# Altium PCB PCB1.PcbDoc
Units mm, origin at the board's own origin, x right, y up, seen from the top; angles counter-clockwise.
Board outline 100 x 96.5 mm, 2 copper layers (Top Layer, Bottom Layer), stack 1.98 mm thick; 68 components, 98 nets, 369 pads, 163 vias.
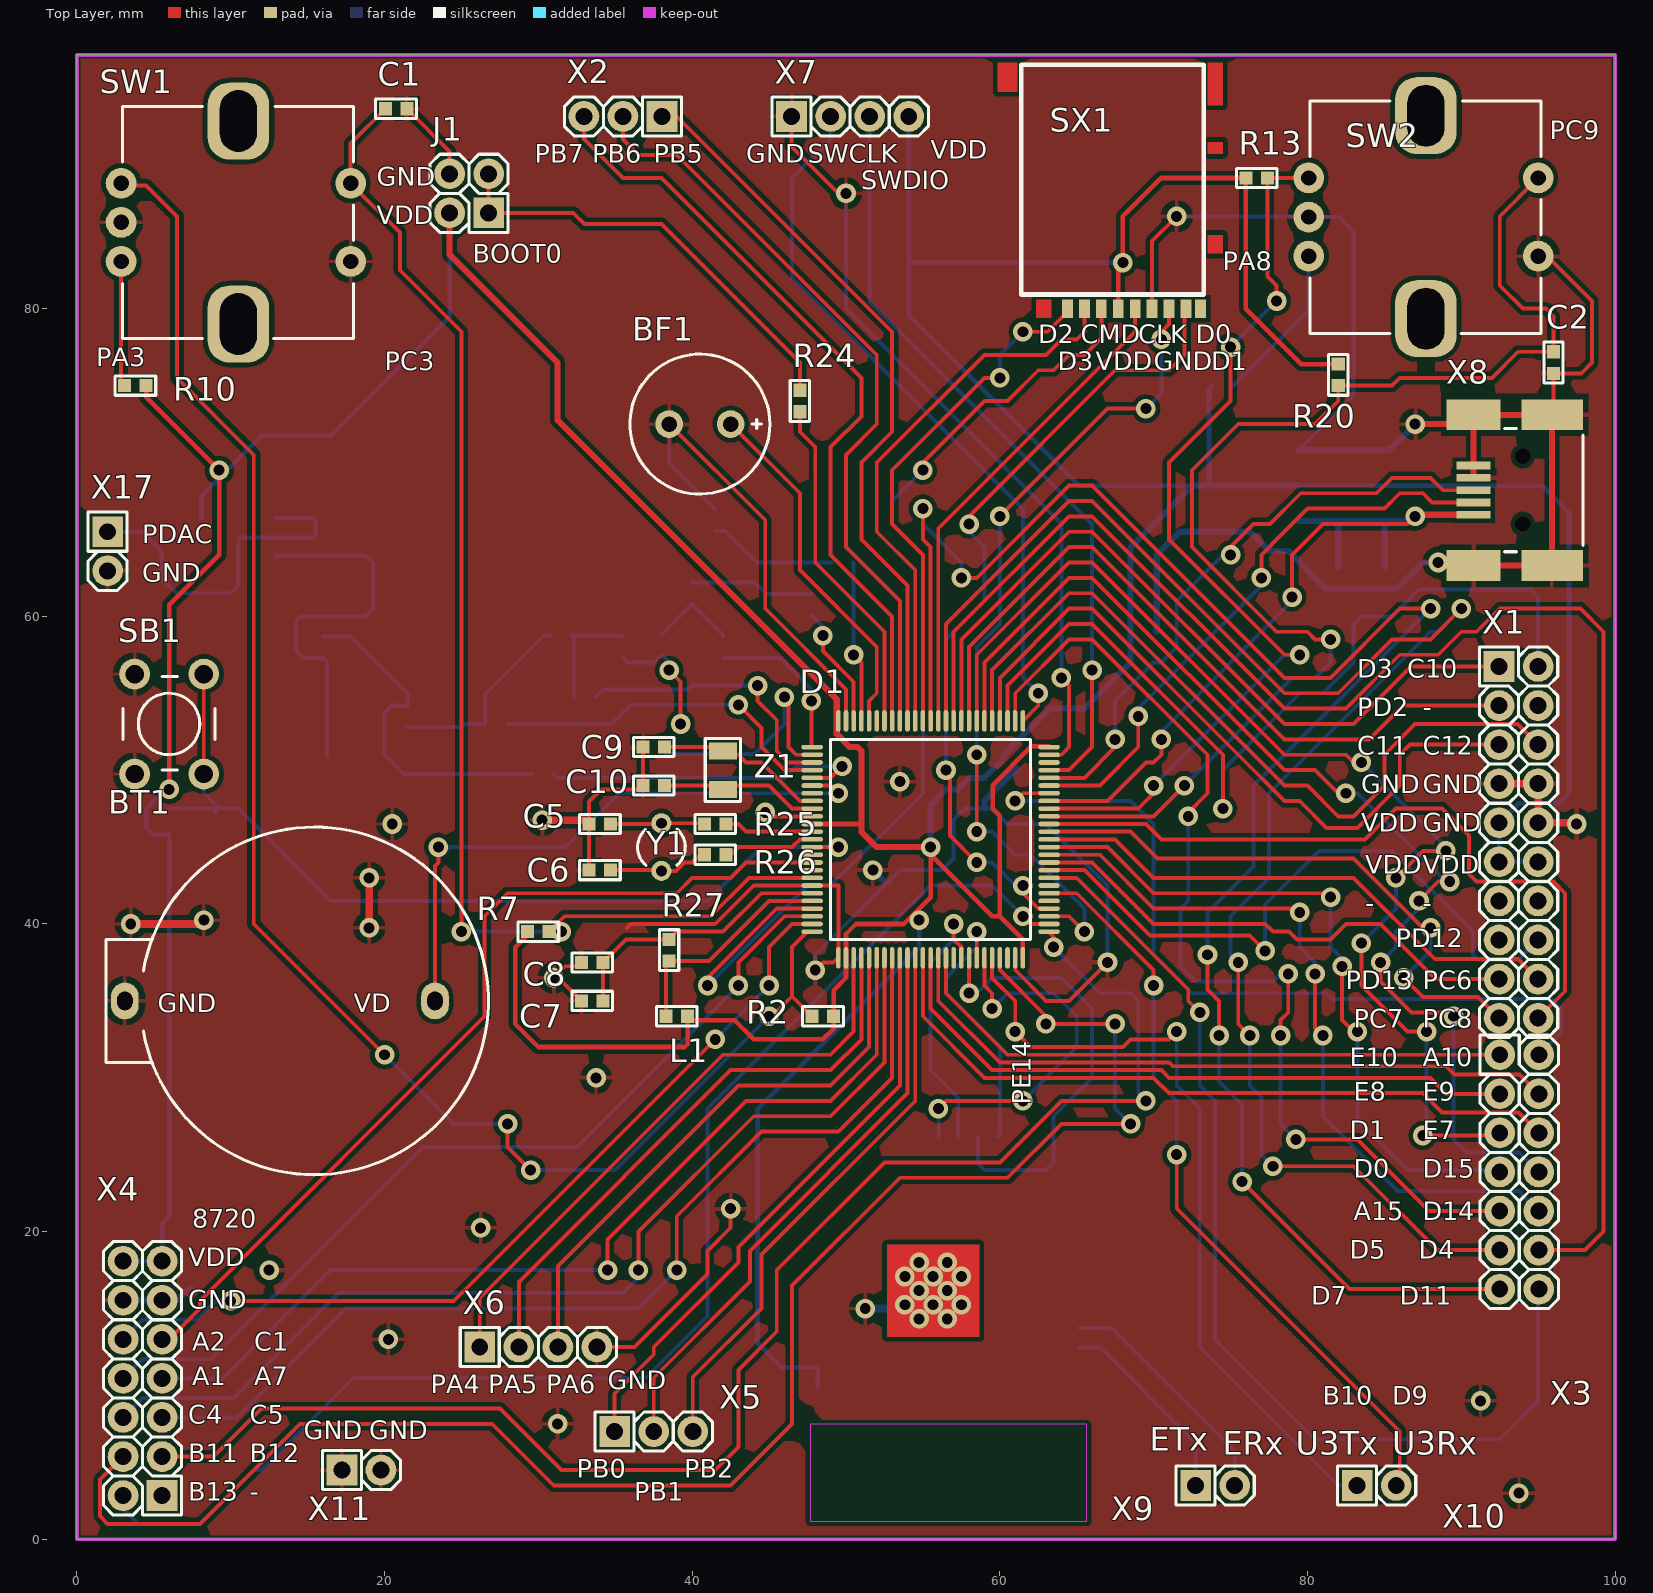
[diagram p0: Top Layer view]
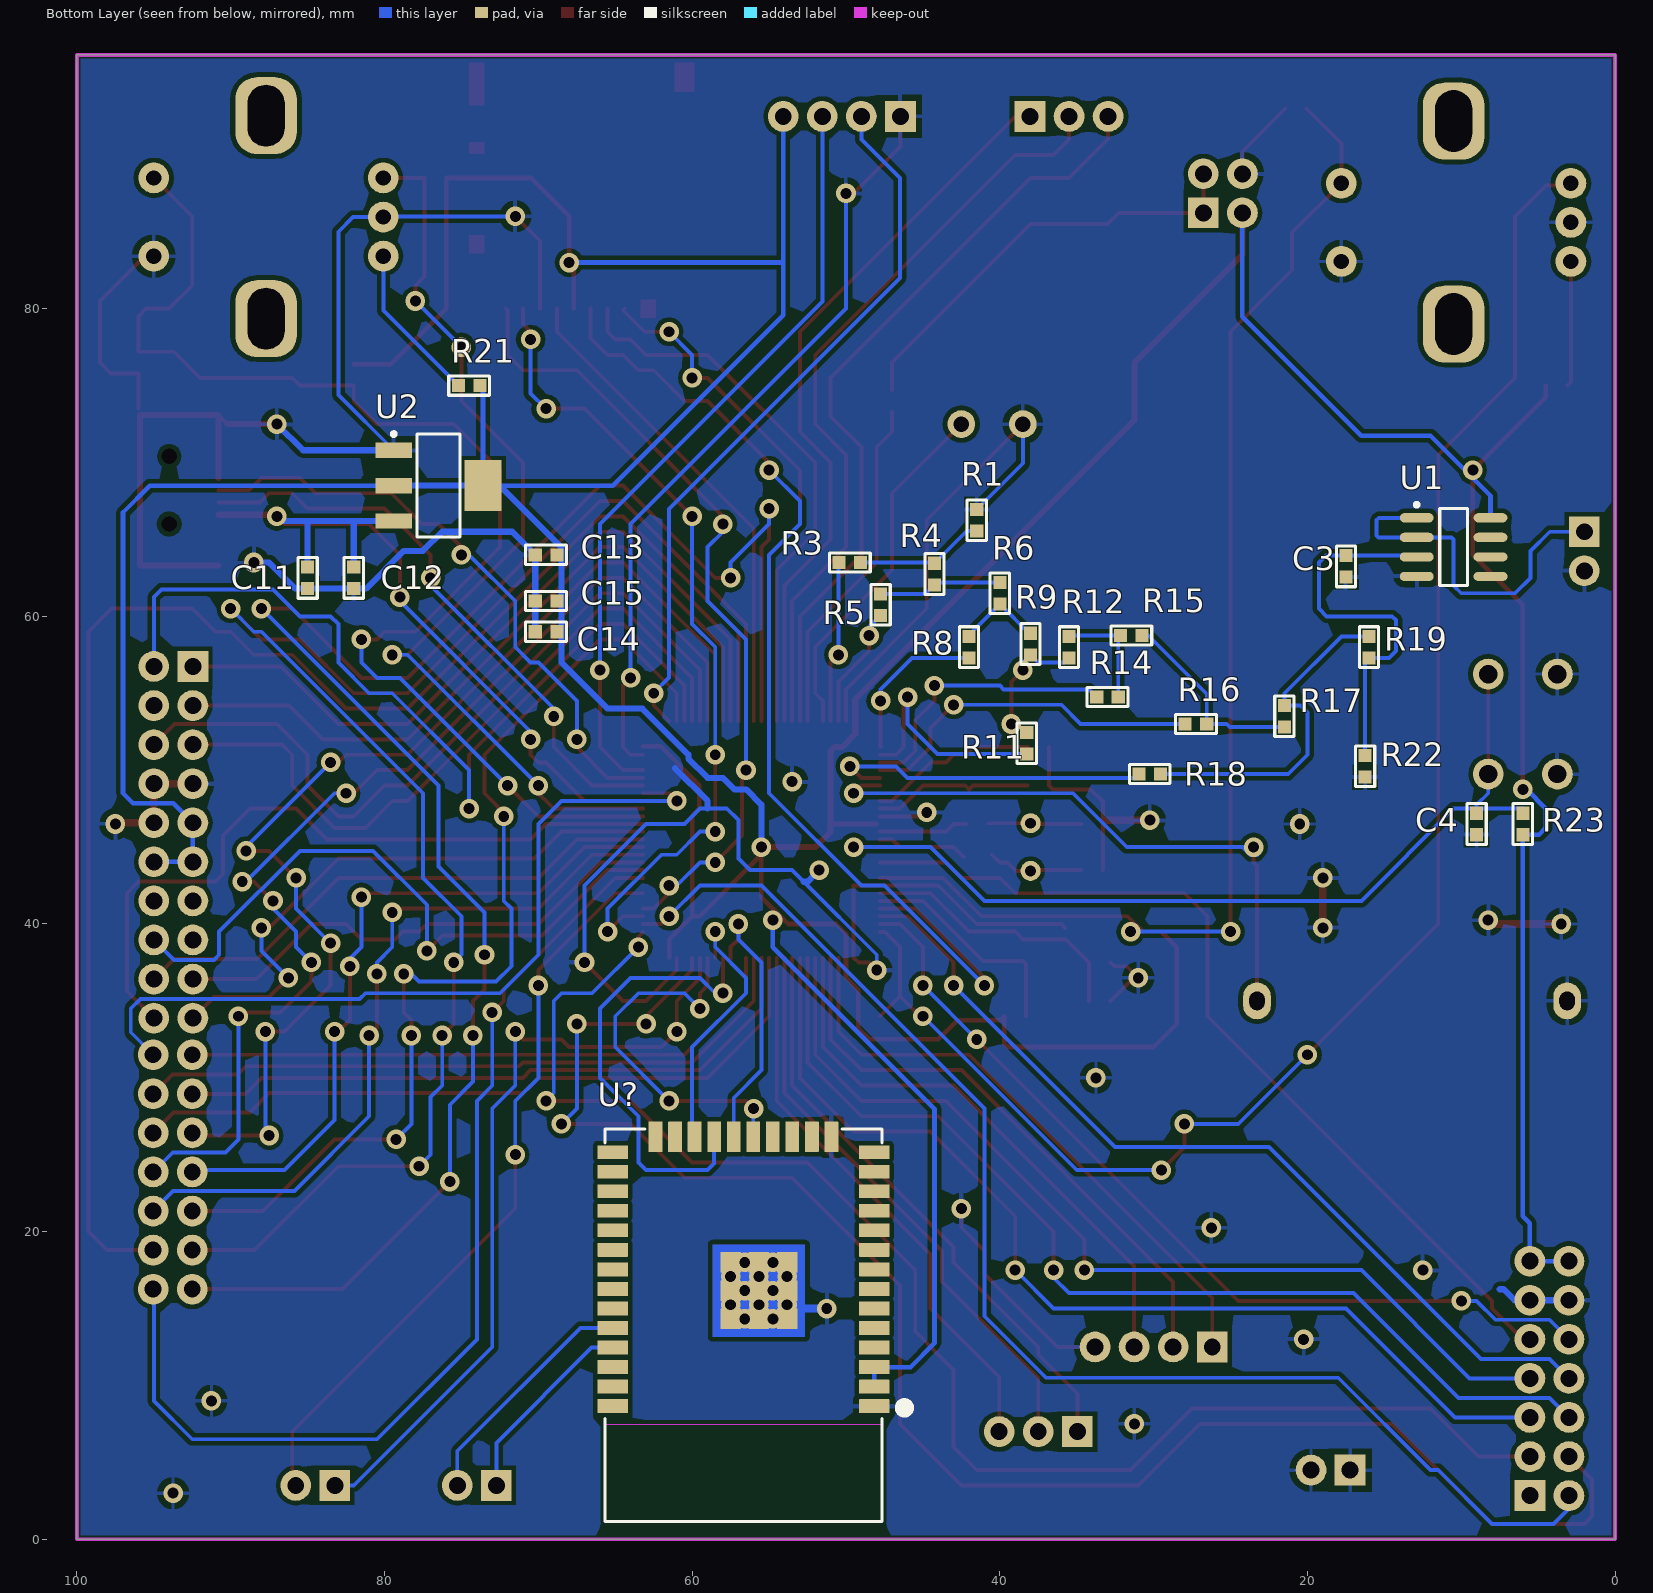
[diagram p1: Bottom Layer view, seen from below]
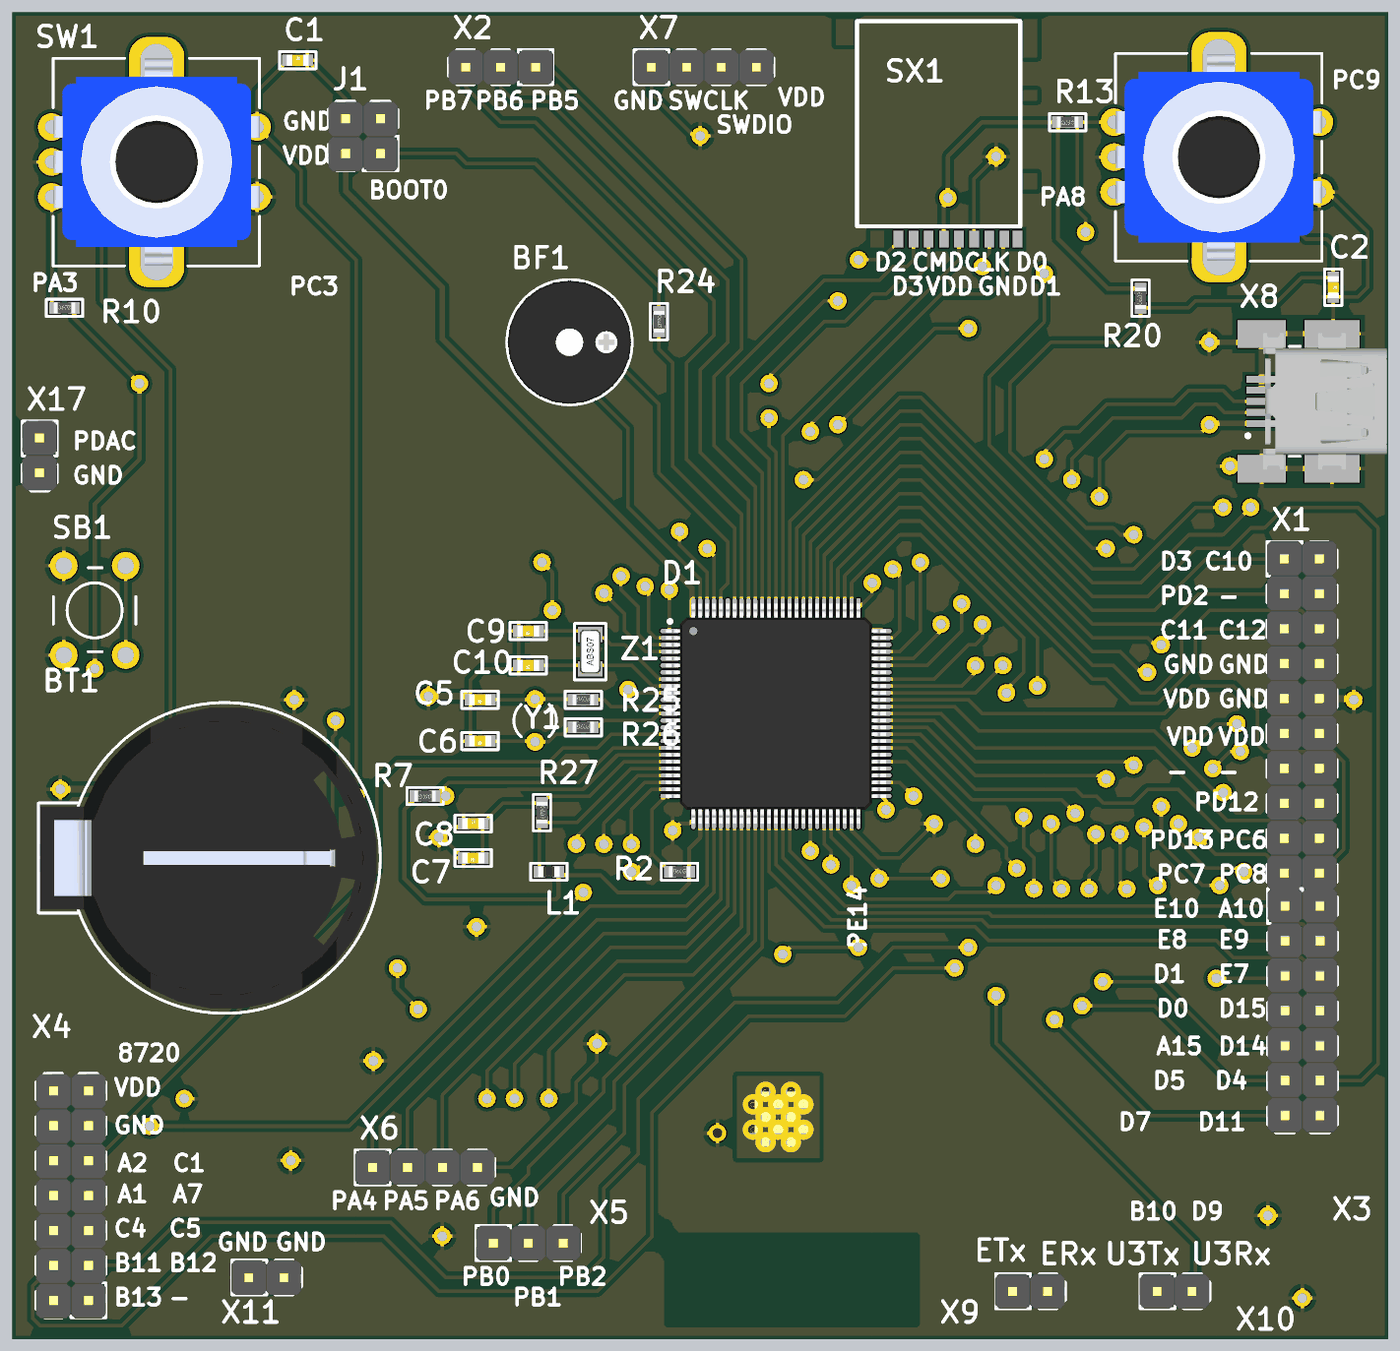
[diagram p2: 3D render of the assembled board from above, using the file's embedded part models]
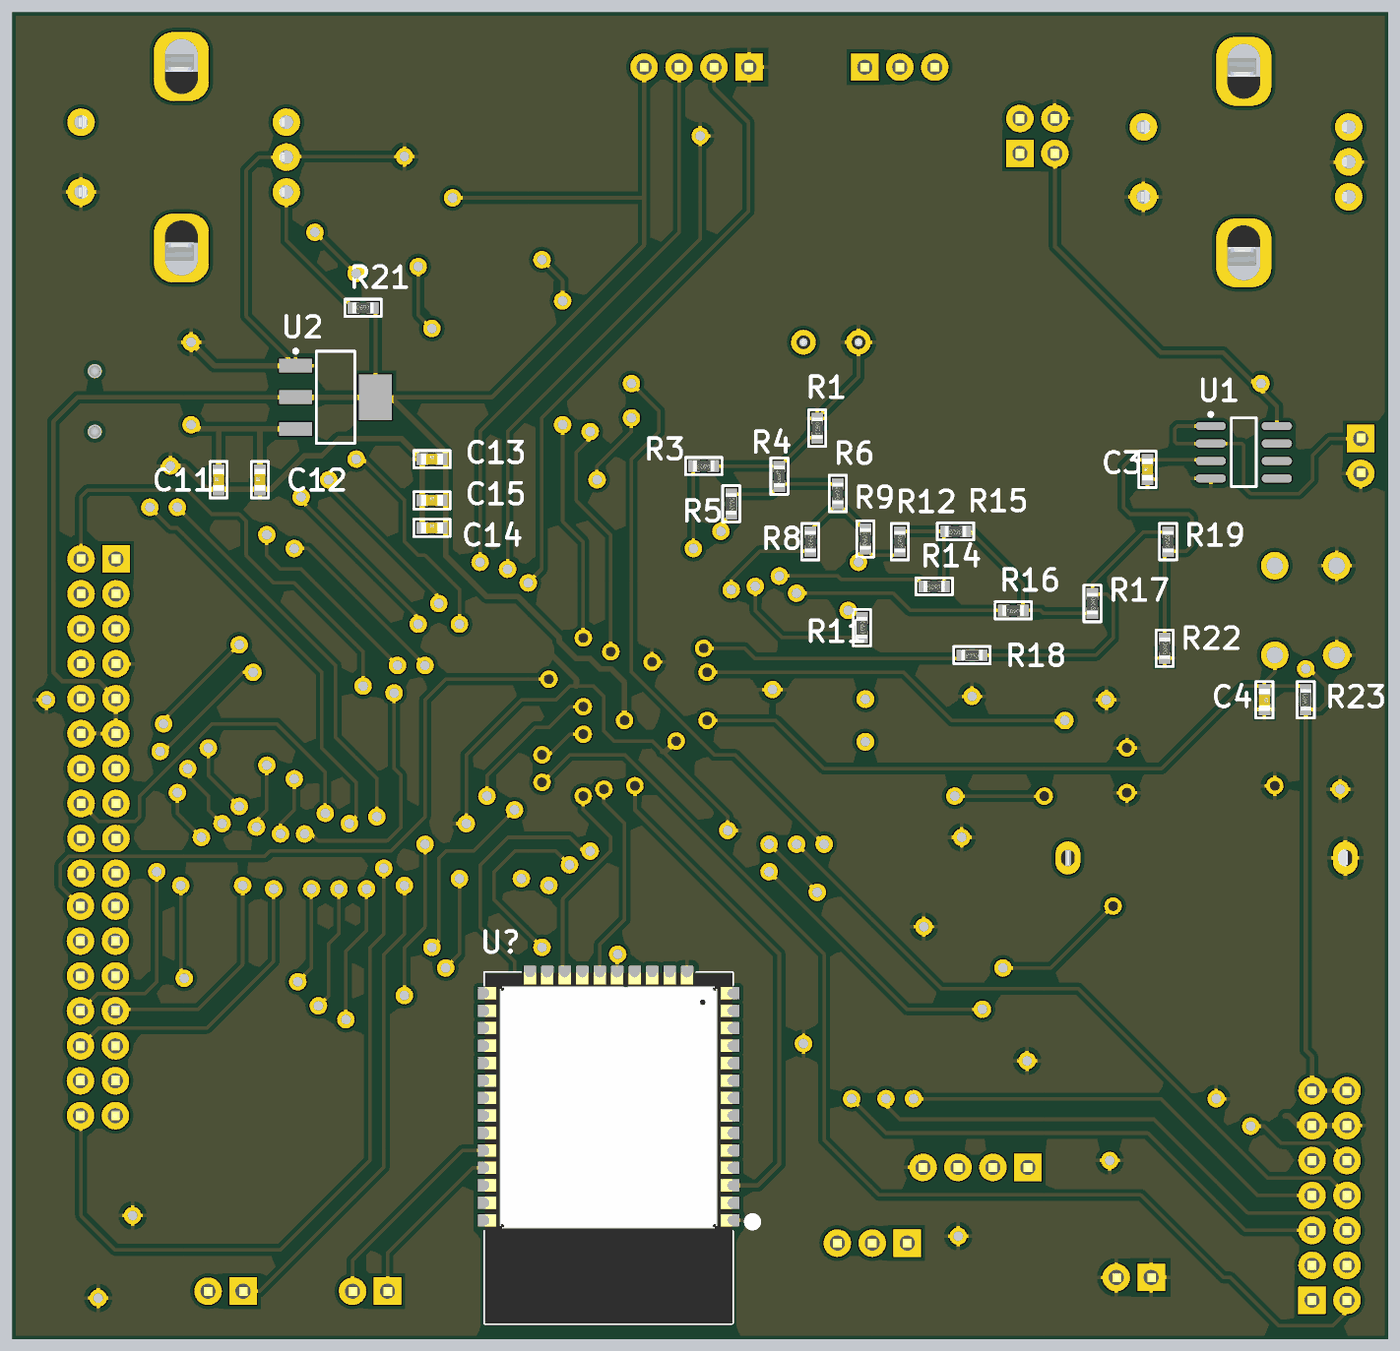
[diagram p3: 3D render of the assembled board from below, using the file's embedded part models]

## Layer stack, top to bottom
Top Solder: solder mask 0.0102, Solder Resist, Dk 3.5
Top Layer: signal copper 0.0356
Dielectric 1: dielectric 1.909, FR-4, Dk 4.8
Bottom Layer: signal copper 0.0356
Bottom Solder: solder mask 0.0102, Solder Resist, Dk 3.5

## Board outline
0,0 100,0 100,96.5 0,96.5

## Design rules (kind name [scope] priority, off if disabled: settings)
Clearance [All] p1: gap=0.3 ignorepadtopadclearanceinfootprint=FALSE
PolygonConnect [All] p1: connectstyle=Relief reliefconductorwidth=0.254 reliefentries=4 polygonreliefangle="90 Angle" airgapwidth=0.4
RoomDefinition Sheet1 [InComponentClass('Sheet1')] p1: confinementstyle=ConfineIn formatcopy=TRUE lockcomponents=FALSE outline -125,-125 -74.2,-125 -74.2,-99.6 -125,-99.6
RoutingVias [All] p1: holewidth=0.711 width=1.27 viastyle="Through Hole" minholewidth=0.711 minwidth=1.27 maxholewidth=0.711 maxwidth=1.27
SolderMaskExpansion [All] p1: expansion=0.102
UnpouredPolygon [InNet('GND')] p1:
Width [InNet('GND')] p1: maxlimit=0.6 minlimit=0.3 preferedwidth=0.4
29 further rules are at their usual default settings.

## Components (designator, comment, footprint, x,y, rotation, side; value= is the part's Value field where it differs from the comment)
BF1 "DIP switch, 2.73 kHz, 3VDC, 80mA, -20...+70°C" "BUZ: AT-0927-TT-6-R" 40.5,72.5 r0 top
BT1 "BAT3volt" BTH2032 15.5,35 r0 top
C1 "Ceramic capacitor, 100nF, X7R, ±10%, 16V, 0603, -55...+125°C" "CAP: 0603" 20.75,93 r0 top value=100nF
C2 "Ceramic capacitor, 100nF, X7R, ±10%, 16V, 0603, -55...+125°C" "CAP: 0603" 96,76.5 r270 top value=100nF
C3 "Ceramic capacitor, 20pF, X7R, ±10%, 16V, 0603, -55...+125°C" "CAP: 0603" 17.5,63.25 r90 bottom value=20pF
C4 "Ceramic capacitor, 100nF, X7R, ±10%, 16V, 0603, -55...+125°C" "CAP: 0603" 9,46.5 r270 bottom value=100nF
C5 "Ceramic capacitor, 20pF, X7R, ±10%, 16V, 0603, -55...+125°C" "CAP: 0603" 34,46.5 r180 top value=20pF
C6 "Ceramic capacitor, 20pF, X7R, ±10%, 16V, 0603, -55...+125°C" "CAP: 0603" 34,43.5 r180 top value=20pF
C7 "Ceramic capacitor, 4.7uF, X7R, ±10%, 16V, 0603, -55...+125°C" "CAP: 0603" 33.5,35 r180 top value=4.7uF
C8 "Ceramic capacitor, 100nF, X7R, ±10%, 16V, 0603, -55...+125°C" "CAP: 0603" 33.5,37.5 r0 top value=100nF
C9 "Ceramic capacitor, 20pF, X7R, ±10%, 16V, 0603, -55...+125°C" "CAP: 0603" 37.5,51.5 r180 top value=20pF
C10 "Ceramic capacitor, 20pF, X7R, ±10%, 16V, 0603, -55...+125°C" "CAP: 0603" 37.5,49 r180 top value=20pF
C11 "Ceramic capacitor, 1uF, X7R, ±10%, 16V, 0603, -55...+125°C" "CAP: 0603" 85,62.5 r90 bottom value=1uF
C12 "Ceramic capacitor, 100nF, X7R, ±10%, 16V, 0603, -55...+125°C" "CAP: 0603" 82,62.5 r90 bottom value=100nF
C13 "Ceramic capacitor, 10nF, X7R, ±10%, 16V, 0603, -55...+125°C" "CAP: 0603" 69.5,64 r180 bottom value=10nF
C14 "Ceramic capacitor, 1uF, X7R, ±10%, 16V, 0603, -55...+125°C" "CAP: 0603" 69.5,59 r180 bottom value=1uF
C15 "Ceramic capacitor, 100nF, X7R, ±10%, 16V, 0603, -55...+125°C" "CAP: 0603" 69.5,61 r180 bottom value=100nF
D1 "IC microcontroller, 32-Bit, Cortex-M7, 400MHz, 2048KB, 1024KB, 1.71...3.6V, -40...+85°C, 100-LQFP" 100-LQFP 55.5,45.5 r0 top
J1 "ValueManufacturerPartNumber" "CON: PLD-4" 25.5,87.5 r90 top
L1 "Fixed inductor, 10μH, ±20%, 0603, 50mA, -55...+125°C" "IND: 0603" 39,34 r0 top value=10?H
R1 "Resistor film, 2 kOhm, ±1%, 0603, 0.1W, -55...+125°C" "RES: 0603" 41.5,66.25 r270 bottom value="2 kOhm"
R2 "Resistor film, 10 kOhm, ±5%, 0603, 0.1W, -55...+125°C" "RES: 0603" 48.5,34 r0 top value="10 kOhm"
R3 "Resistor film, 2 kOhm, ±1%, 0603, 0.1W, -55...+125°C" "RES: 0603" 49.75,63.5 r0 bottom value="2 kOhm"
R4 "Resistor film, 1 kOhm, ±1%, 0603, 0.1W, -55...+125°C" "RES: 0603" 44.25,62.75 r90 bottom value="1 kOhm"
R5 "Resistor film, 2 kOhm, ±1%, 0603, 0.1W, -55...+125°C" "RES: 0603" 47.75,60.75 r270 bottom value="2 kOhm"
R6 "Resistor film, 1 kOhm, ±1%, 0603, 0.1W, -55...+125°C" "RES: 0603" 40,61.5 r90 bottom value="1 kOhm"
R7 "Resistor film, 10 kOhm, ±5%, 0603, 0.1W, -55...+125°C" "RES: 0603" 30,39.5 r180 top value="10 kOhm"
R8 "Resistor film, 2 kOhm, ±1%, 0603, 0.1W, -55...+125°C" "RES: 0603" 42,58 r270 bottom value="2 kOhm"
R9 "Resistor film, 1 kOhm, ±1%, 0603, 0.1W, -55...+125°C" "RES: 0603" 38,58.2 r90 bottom value="1 kOhm"
R10 "Resistor film, 10 kOhm, ±5%, 0603, 0.1W, -55...+125°C" "RES: 0603" 3.8,75 r0 top value="10 kOhm"
R11 "Resistor film, 2 kOhm, ±1%, 0603, 0.1W, -55...+125°C" "RES: 0603" 38.25,51.75 r270 bottom value="2 kOhm"
R12 "Resistor film, 1 kOhm, ±1%, 0603, 0.1W, -55...+125°C" "RES: 0603" 35.5,58 r270 bottom value="1 kOhm"
R13 "Resistor film, 10 kOhm, ±5%, 0603, 0.1W, -55...+125°C" "RES: 0603" 76.7,88.5 r180 top value="10 kOhm"
R14 "Resistor film, 2 kOhm, ±1%, 0603, 0.1W, -55...+125°C" "RES: 0603" 33,54.75 r0 bottom value="2 kOhm"
R15 "Resistor film, 1 kOhm, ±1%, 0603, 0.1W, -55...+125°C" "RES: 0603" 31.45,58.75 r0 bottom value="1 kOhm"
R16 "Resistor film, 2 kOhm, ±1%, 0603, 0.1W, -55...+125°C" "RES: 0603" 27.25,53 r0 bottom value="2 kOhm"
R17 "Resistor film, 1 kOhm, ±1%, 0603, 0.1W, -55...+125°C" "RES: 0603" 21.5,53.5 r270 bottom value="1 kOhm"
R18 "Resistor film, 2 kOhm, ±1%, 0603, 0.1W, -55...+125°C" "RES: 0603" 30.25,49.75 r0 bottom value="2 kOhm"
R19 "Resistor film, 2 kOhm, ±1%, 0603, 0.1W, -55...+125°C" "RES: 0603" 16,58 r90 bottom value="2 kOhm"
R20 "Resistor film, 10 kOhm, ±5%, 0603, 0.1W, -55...+125°C" "RES: 0603" 82,75.7 r90 top value="10 kOhm"
R21 "Resistor film, 10 kOhm, ±5%, 0603, 0.1W, -55...+125°C" "RES: 0603" 74.5,75 r180 bottom value="10 kOhm"
R22 "Resistor film, 100 kOhm, ±1%, 0603, 0.1W, -55...+125°C" "RES: 0603" 16.25,50.25 r270 bottom value="100 kOhm"
R23 "Resistor film, 100 kOhm, ±5%, 0603, 0.1W, -55...+125°C" "RES: 0603" 6,46.5 r90 bottom value="100 kOhm"
R24 "Resistor film, 10 kOhm, ±5%, 0603, 0.1W, -55...+125°C" "RES: 0603" 47,74 r270 top value="10 kOhm"
R25 "Resistor film, 0 Ohm, ±5%, 0603, 0.1W, -55...+125°C" "RES: 0603" 41.5,46.5 r0 top value="0 Ohm"
R26 "Resistor film, 220 Ohm, ±5%, 0603, 0.1W, -55...+125°C" "RES: 0603" 41.5,44.5 r0 top value="220 Ohm"
R27 "Resistor film, 47Ohm, ±5%, 0603, 0.1W, -55...+125°C" "RES: 0603" 38.5,38.3 r270 top value=47Ohm
SB1 "Tactile button, 6x6mm" "BUT: 6x6" 6,53 r90 top
SW1 "Quadrature encoder, PEC12R" "ENC: PEC-12" 2.875,88.15 r270 top
SW2 "Quadrature encoder, PEC12R" "ENC: PEC-12" 80.078,88.5 r270 top
SX1 "Microsd" microsd 74.5,96 r180 top
U1 "ADA4891-2ARZ-RL" ADI-R-8_N 10.5,64.5 r180 bottom
U2 "LD1117AS33TR" SOT-223_N 76.5,68.5 r180 bottom
U? "ESP-WROOM-32" "Espressif ESP32-WROOM-32" 56.665,16.165 r0 bottom
X1 "Connector, 20pin, 2.54mm, 500VAC, 3A" "CON: PLD-20" 93.73,45.31 r270 top
X2 "Connector, 3pin, 2.54mm, 500VAC, 3A" "CON: PLS-3" 35.5,92.5 r180 top
X3 "Connector, 14pin, 2.54mm, 500VAC, 3A" "CON: PLD-14"#1 93.77,23.88 r270 top
X4 "Connector, 14pin, 2.54mm, 500VAC, 3A" "CON: PLD-14"#2 4.27,10.46 r90 top
X5 "Connector, 3pin, 2.54mm, 500VAC, 3A" "CON: PLS-3" 37.5,7 r0 top
X6 "Connector, 4pin, 2.54mm, 500VAC, 3A" "CON: PLS-4" 30,12.5 r0 top
X7 "Connector, 4pin, 2.54mm, 500VAC, 3A" "CON: PLS-4" 50.27,92.5 r0 top
X8 "USB mini B" "CON: 0675031020" 90.8,68.2 r180 top
X9 "Connector, 2pin, 2.54mm, 500VAC, 3A" "CON: PLS-2" 74,3.5 r0 top
X10 "Connector, 2pin, 2.54mm, 500VAC, 3A" "CON: PLS-2" 84.5,3.5 r0 top
X11 "Connector, 2pin, 2.54mm, 500VAC, 3A" "CON: PLS-2" 18.5,4.5 r0 top
X17 "Connector, 2pin, 2.54mm, 500VAC, 3A" "CON: PLS-2" 2,64.23 r270 top
Y1 "XTAL" R38 38,45 r0 top
Z1 "Crystal, 32.768kHz, 12.5pF, ±20ppm, case 3215, -40...+85°C" "OSC: 3215" 42,50 r90 top

## Footprints (in the part's own frame and the unit in brackets; to place one, negate y for a bottom-side part, rotate by r counter-clockwise, add the part's x,y. Pads: shape width x height; smd on the part's side, far side on the other; paste and mask are expansions set on the pad)
100-LQFP [mm] "Thin QFP, 100-Leads, Body 14x14mm, Pitch 0.5mm, IPC Medium Density"
  oval 1.4x0.3 smd: 1(-7.7,6) 2(-7.7,5.5) 3(-7.7,5) 4(-7.7,4.5) 5(-7.7,4) 6(-7.7,3.5) 7(-7.7,3) 8(-7.7,2.5) 9(-7.7,2) 10(-7.7,1.5) 11(-7.7,1) 12(-7.7,0.5) 13(-7.7,0) 14(-7.7,-0.5) 15(-7.7,-1) 16(-7.7,-1.5) 17(-7.7,-2) 18(-7.7,-2.5) 19(-7.7,-3) 20(-7.7,-3.5) 21(-7.7,-4) 22(-7.7,-4.5) 23(-7.7,-5) 24(-7.7,-5.5) 25(-7.7,-6) 51(7.7,-6) 52(7.7,-5.5) 53(7.7,-5) 54(7.7,-4.5) 55(7.7,-4) 56(7.7,-3.5) 57(7.7,-3) 58(7.7,-2.5) 59(7.7,-2) 60(7.7,-1.5) 61(7.7,-1) 62(7.7,-0.5) 63(7.7,0) 64(7.7,0.5) 65(7.7,1) 66(7.7,1.5) 67(7.7,2) 68(7.7,2.5) 69(7.7,3) 70(7.7,3.5) 71(7.7,4) 72(7.7,4.5) 73(7.7,5) 74(7.7,5.5) 75(7.7,6)
  oval 0.3x1.4 smd: 26(-6,-7.7) 27(-5.5,-7.7) 28(-5,-7.7) 29(-4.5,-7.7) 30(-4,-7.7) 31(-3.5,-7.7) 32(-3,-7.7) 33(-2.5,-7.7) 34(-2,-7.7) 35(-1.5,-7.7) 36(-1,-7.7) 37(-0.5,-7.7) 38(0,-7.7) 39(0.5,-7.7) 40(1,-7.7) 41(1.5,-7.7) 42(2,-7.7) 43(2.5,-7.7) 44(3,-7.7) 45(3.5,-7.7) 46(4,-7.7) 47(4.5,-7.7) 48(5,-7.7) 49(5.5,-7.7) 50(6,-7.7) 76(6,7.7) 77(5.5,7.7) 78(5,7.7) 79(4.5,7.7) 80(4,7.7) 81(3.5,7.7) 82(3,7.7) 83(2.5,7.7) 84(2,7.7) 85(1.5,7.7) 86(1,7.7) 87(0.5,7.7) 88(0,7.7) 89(-0.5,7.7) 90(-1,7.7) 91(-1.5,7.7) 92(-2,7.7) 93(-2.5,7.7) 94(-3,7.7) 95(-3.5,7.7) 96(-4,7.7) 97(-4.5,7.7) 98(-5,7.7) 99(-5.5,7.7) 100(-6,7.7)
  round 0.5 on Top Overlay: ""(-7.7,6.7)
  round 0.5 on Mech1: ""(-7.5,7.5)
  silkscreen extent -6.5,-6.5 6.5,6.5, body extent -8,-7.99 8,8.01, height 1.5
ADI-R-8_N [mm] "SOIC, 8-Leads, Body 4.9x3.9mm, Pitch 1.27mm, IPC Medium Density"
  oval 2.2x0.6 smd: 1(-2.4,1.905) 2(-2.4,0.635) 3(-2.4,-0.635) 4(-2.4,-1.905) 5(2.4,-1.905) 6(2.4,-0.635) 7(2.4,0.635) 8(2.4,1.905)
  silkscreen extent -2.53,-2.5 0.9,2.88, body extent -2,-2.5 2,2.5, height 1.75
BTH2032 [mm] "CR2032 BATTERY HOLDER"
  oval 1.8x2.4 hole 1 slot 1.2 at 90 deg: 1(-12.38,0) 2(7.78,0)
  silkscreen extent -13.6,-11.3 11.25,11.3, body extent -13.45,-11 11.05,11, height 8.5
"BUT: 6x6" [mm] "Leaded Tactile Button 6x6"
  round 2 hole 1.2: 1(-3.25,2.25) 1(3.25,2.25) 2(-3.25,-2.25) 2(3.25,-2.25)
  silkscreen extent -3,-2.99 3.1,3.01, body extent -3.15,-2.96 3.25,3.04, height 4.5
"BUZ: AT-0927-TT-6-R" [mm]
  round 1.8 hole 1: 1(2,0) 2(-2,0)
  silkscreen extent -4.55,-4.55 4.55,4.55, body extent -4.5,-4.5 4.5,4.5, height 4.52
"CAP: 0603" [mm]
  rect 0.85x0.85 smd: 1(-0.7,0) 2(0.7,0)
  silkscreen extent -1.33,-0.63 1.33,0.63, body extent -0.8,-0.4 0.8,0.4, height 0.3
"CON: 0675031020" [mm]
  rect 4x2 smd: 0(-5.1,4.9) 0(-5.1,-4.9)
  rect 3.5x2 smd: 0(0,4.9) 0(0,-4.9)
  rect 2.2x0.5 smd: 1(0,1.6) 2(0,0.8) 3(0,0) 4(0,-0.8) 5(0,-1.6)
  round 0 hole 1: ""(-3.2,2.2) ""(-3.2,-2.2)
  round 0.5 on Mech1: ""(-0.6,4.5)
  round 0.5 on Top Overlay: ""(1,2.5)
  silkscreen extent -7.1,-4 -2,4, body extent -9.1,-4.95 -0.1,4.95, height 3.95
"CON: PLD-4" [mm]
  rect 2x2 hole 1.1: 1(-1.27,-1.27)
  round 2 hole 1.1: 2(-1.27,1.27) 3(1.27,-1.27) 4(1.27,1.27)
  silkscreen extent -2.54,-2.54 2.54,2.54, body extent -2.59,-2.55 2.49,2.53, height 8.54
"CON: PLD-14"#1 [mm]
  round 2 hole 1.1: 1(-7.62,-1.27) 2(-7.62,1.27) 3(-5.08,-1.27) 4(-5.08,1.27) 5(-2.54,-1.27) 6(-2.54,1.27) 7(0,-1.27) 8(0,1.27) 9(2.54,-1.27) 10(2.54,1.27) 11(5.08,-1.27) 12(5.08,1.27) 13(7.62,-1.27) 14(7.62,1.27)
  silkscreen extent -8.89,-2.54 8.89,2.54, body extent -8.94,-2.55 8.84,2.53, height 8.54
"CON: PLD-14"#2 [mm]
  rect 2x2 hole 1.1: 1(-7.62,-1.27)
  round 2 hole 1.1: 2(-7.62,1.27) 3(-5.08,-1.27) 4(-5.08,1.27) 5(-2.54,-1.27) 6(-2.54,1.27) 7(0,-1.27) 8(0,1.27) 9(2.54,-1.27) 10(2.54,1.27) 11(5.08,-1.27) 12(5.08,1.27) 13(7.62,-1.27) 14(7.62,1.27)
  silkscreen extent -8.89,-2.54 8.89,2.54, body extent -8.94,-2.55 8.84,2.53, height 8.54
"CON: PLD-20" [mm]
  rect 2x2 hole 1.1: 1(-11.43,-1.27)
  round 2 hole 1.1: 2(-11.43,1.27) 3(-8.89,-1.27) 4(-8.89,1.27) 5(-6.35,-1.27) 6(-6.35,1.27) 7(-3.81,-1.27) 8(-3.81,1.27) 9(-1.27,-1.27) 10(-1.27,1.27) 11(1.27,-1.27) 12(1.27,1.27) 13(3.81,-1.27) 14(3.81,1.27) 15(6.35,-1.27) 16(6.35,1.27) 17(8.89,-1.27) 18(8.89,1.27) 19(11.43,-1.27) 20(11.43,1.27)
  silkscreen extent -12.7,-2.54 12.7,2.54, body extent -12.75,-2.55 12.65,2.53, height 8.54
"CON: PLS-2" [mm]
  rect 2x2 hole 1.1: 1(-1.27,0)
  round 2 hole 1.1: 2(1.27,0)
  silkscreen extent -2.54,-1.27 2.54,1.27, body extent -2.57,-1.28 2.51,1.26, height 8.54
"CON: PLS-3" [mm]
  rect 2x2 hole 1.1: 1(-2.54,0)
  round 2 hole 1.1: 2(0,0) 3(2.54,0)
  silkscreen extent -3.81,-1.27 3.81,1.27, body extent -3.81,-1.27 3.81,1.27, height 8.54
"CON: PLS-4" [mm] "PLS-40 4 pin header"
  rect 2x2 hole 1.1: 1(-3.81,0)
  round 2 hole 1.1: 2(-1.27,0) 3(1.27,0) 4(3.81,0)
  silkscreen extent -5.08,-1.27 5.08,1.27, body extent -5.08,-1.27 5.08,1.27, height 8.54
"ENC: PEC-12" [mm]
  round 2 hole 1: 1(0,0) 2(2.54,0) 3(5.08,0) 4(5.08,14.922) 5(0,14.922)
  rrect70% 5x4 hole 2.4 slot 4 at 0 deg: ""(-4.05,7.625) ""(9.15,7.625)
  silkscreen extent -5,0.1 10.1,15.1, body extent -4.96,0.12 10.04,15.12, height 16.5
"Espressif ESP32-WROOM-32" [mm] "39-SMD Module"
  rrect10% 2x0.9 smd paste+0 mask+0.05: 1(-8.5,7.51) 2(-8.5,6.24) 3(-8.5,4.97) 4(-8.5,3.7) 5(-8.5,2.43) 6(-8.5,1.16) 7(-8.5,-0.11) 8(-8.5,-1.38) 9(-8.5,-2.65) 10(-8.5,-3.92) 11(-8.5,-5.19) 12(-8.5,-6.46) 13(-8.5,-7.73) 14(-8.5,-9) 25(8.5,-9) 26(8.5,-7.73) 27(8.5,-6.46) 28(8.5,-5.19) 29(8.5,-3.92) 30(8.5,-2.65)
  rrect10% 0.9x2 smd paste+0 mask+0.05: 15(-5.715,-10) 16(-4.445,-10) 17(-3.175,-10) 18(-1.905,-10) 19(-0.635,-10) 20(0.635,-10) 21(1.905,-10) 22(3.175,-10) 23(4.445,-10) 24(5.715,-10)
  rect 2x0.9 smd paste+0 mask+0.05: 31(8.5,-1.38) 32(8.5,-0.11) 33(8.5,1.16) 34(8.5,2.43) 35(8.5,3.7) 36(8.5,4.97) 37(8.5,6.24) 38(8.5,7.51)
  rect 1.33x1.33 smd paste+0 mask+0.05: 39(-2.835,-1.835) 39(-2.835,0) 39(-2.835,1.835) 39(-1,0) 39(-1,-1.835) 39(-1,1.835) 39(0.835,-1.835) 39(0.835,0) 39(0.835,1.835)
  Top Layer region: -4,3 2,3 2,-3 -4,-3
  Bottom Layer region: -4,3 2,3 2,-3 -4,-3
  Keep-Out Layer region: -9,15 9,15 9,8.7 -9,8.7
  silkscreen extent -10.71,-10.5 9,15, body extent -9,-10.5 9,15, height 3.2
"IND: 0603" [mm]
  rect 0.85x0.85 smd: 1(-0.7,0) 2(0.7,0)
  silkscreen extent -1.33,-0.63 1.33,0.63, body extent -0.8,-0.4 0.8,0.4, height 0.8
microsd [mm]
  rect 0.7x1.2 smd: 1(10.1,16) 2(9,16) 3(7.9,16) 4(6.8,16) 5(5.7,16) 6(4.6,16) 7(3.5,16) 8(2.4,16) 9(1.45,16)
  Top Layer region: 11.15,15.4 12.15,15.4 12.15,16.6 11.15,16.6
  Top Layer region: 0,11.2 1,11.2 1,12.4 0,12.4
  Top Layer region: 13.35,0 14.65,0 14.65,1.9 13.35,1.9
  Top Layer region: 0,0 1,0 1,2.8 0,2.8
  Top Layer region: 0,5.15 1,5.15 1,5.95 0,5.95
  silkscreen extent 1.25,0.15 13.1,15.07
"OSC: 3215" [mm]
  rect 1.1x1.8 smd: 1(-1.25,0) 2(1.25,0)
  silkscreen extent -2.05,-1.15 2.05,1.15, body extent -1.61,-0.76 1.61,0.76, height 0.91
R38 [mm] "Crystal, Thru-Hole; 2 Leads; Body 3.1 x 8.2 mm (Dia.xH)"
  round 1.3 hole 0.7: 1(0,1.55) 2(0,-1.55)
  silkscreen extent -1.55,-1.19 1.55,1.17
"RES: 0603" [mm]
  rect 0.85x0.85 smd: 1(-0.7,0) 2(0.7,0)
  silkscreen extent -1.33,-0.63 1.33,0.63, body extent -0.8,-0.4 0.8,0.4, height 0.44
SOT-223_N [mm] "SOT223, 4-Leads, Body 6.5x3.5mm, Pitch 2.3mm, Lead Span 7mm, IPC Medium Density"
  rect 2.4x1 smd: 1(-2.9,2.3) 2(-2.9,0) 3(-2.9,-2.3)
  rect 2.4x3.3 smd: 4(2.9,0)
  silkscreen extent -3.03,-3.35 1.4,3.47, body extent -1.85,-3.35 1.85,3.35, height 1.8

## Part data
BF1: library part Buzzer, CurrentMax=80mA, Frequency="2.73 kHz", Manufacturer="PUI Audio", PartNumber=AT-0927-TT-6-R, Temperature=-20...+70°C, VoltageMax=3VDC, HelpURL=https://www.digikey.com/products/en?keywords=AT-0927-TT-6-R, TypeBuzzer="DIP switch", ValueManufacturerPartNumber="DIP switch, 2.73 kHz, 3VDC, 80mA, -20...+70°C"
BT1: library part BATH_CR2032, "BATTERY HOLDER, CR2032", .=http://www.chila.ir, MANF_P#=-
C1 C2 C3 C4 C5 C6 C7 C8 C9 C10 C11 C12 C13 C14 C15: library part Ceramic_0603, Manufacturer=Yageo, Package=0603, PartNumber=CC0603KRX7R7BB104, Temperature=-55...+125°C, Tolerance=±10%, TypeCapacitor="Ceramic capacitor", TypeDielectric=X7R, Voltage=16V, HelpURL=https://www.digikey.com/product-detail/en/yageo/CC0603KRX7R7BB104/311-1088-1-ND/302998
  C1 C2 C4 C8 C12 C15: ValueManufacturerPartNumber="Ceramic capacitor, 100nF, X7R, ±10%, 16V, 0603, -55...+125°C"
  C3 C5 C6 C9 C10: ValueManufacturerPartNumber="Ceramic capacitor, 20pF, X7R, ±10%, 16V, 0603, -55...+125°C"
  C7: ValueManufacturerPartNumber="Ceramic capacitor, 4.7uF, X7R, ±10%, 16V, 0603, -55...+125°C"
  C11 C14: ValueManufacturerPartNumber="Ceramic capacitor, 1uF, X7R, ±10%, 16V, 0603, -55...+125°C"
  C13: ValueManufacturerPartNumber="Ceramic capacitor, 10nF, X7R, ±10%, 16V, 0603, -55...+125°C"
D1: library part STM32H743VIT6, "Cortex-M7", Manufacturer=STMicroelectronics, Package=100-LQFP, Temperature=-40...+85°C, ComponentType="IC microcontroller", CoreProcessor=Cortex-M7, CoreSize=32-Bit, HelpURL=https://www.digikey.com/products/en?keywords=STM32H743VIT6, MemoryRAM=1024KB, MemoryROM=2048KB, PartNumber=STM32H743VIT6, Speed=400MHz, Supply=1.71...3.6V, ValueManufacturerPartNumber="IC microcontroller, 32-Bit, Cortex-M7, 400MHz, 2048KB, 1024KB, 1.71...3.6V, -40...+85°C, 100-LQFP"
J1: library part Jumper_double, CommentText="\"Ïåðåìû÷êà\""
L1: library part Inductor_0603, Manufacturer="Murata Electronics", MaxCurrent=50mA, Package=0603, PartNumber=LQM18FN100M00D, Temperature=-55...+125°C, Tolerance=±20%, TypeInductor="Fixed inductor", ValueManufacturerPartNumber="Fixed inductor, 10?H, ±20%, 0603, 50mA, -55...+125°C", HelpURL=https://www.digikey.com/product-detail/en/murata-electronics-north-america/LQM18FN100M00D/490-4025-1-ND/1016285
R1 R3 R4 R5 R6 R8 R9 R11 R12 R14 R15 R16 R17 R18 R19 R22: library part Resistor_0603, Manufacturer=Yageo, Package=0603, PartNumber=RC0603JR-07100RL, Power=0.1W, Temperature=-55...+125°C, Tolerance=±1%, TypeResistor="Resistor film", HelpURL=https://www.digikey.com/product-detail/en/yageo/RC0603JR-07100RL/311-100GRCT-ND/729644
  R1 R3 R5 R8 R11 R14 R16 R18 R19: ValueManufacturerPartNumber="Resistor film, 2 kOhm, ±1%, 0603, 0.1W, -55...+125°C"
  R4 R6 R9 R12 R15 R17: ValueManufacturerPartNumber="Resistor film, 1 kOhm, ±1%, 0603, 0.1W, -55...+125°C"
  R22: ValueManufacturerPartNumber="Resistor film, 100 kOhm, ±1%, 0603, 0.1W, -55...+125°C"
R2 R7 R10 R13 R20 R21 R23 R24 R25 R26 R27: library part Resistor_0603, Manufacturer=Yageo, Package=0603, PartNumber=RC0603JR-07100RL, Power=0.1W, Temperature=-55...+125°C, Tolerance=±5%, TypeResistor="Resistor film", HelpURL=https://www.digikey.com/product-detail/en/yageo/RC0603JR-07100RL/311-100GRCT-ND/729644
  R2 R7 R10 R13 R20 R21 R24: ValueManufacturerPartNumber="Resistor film, 10 kOhm, ±5%, 0603, 0.1W, -55...+125°C"
  R23: ValueManufacturerPartNumber="Resistor film, 100 kOhm, ±5%, 0603, 0.1W, -55...+125°C"
  R25: ValueManufacturerPartNumber="Resistor film, 0 Ohm, ±5%, 0603, 0.1W, -55...+125°C"
  R26: ValueManufacturerPartNumber="Resistor film, 220 Ohm, ±5%, 0603, 0.1W, -55...+125°C"
  R27: ValueManufacturerPartNumber="Resistor film, 47Ohm, ±5%, 0603, 0.1W, -55...+125°C"
SB1: library part Button_tactile, Manufacturer="TE Connectivity", Package=6x6mm, PartNumber=FSM2JSMAATR, CommentText="\"Êíîïêà\"", HelpURL=https://www.digikey.com/product-detail/en/te-connectivity-alcoswitch-switches/FSM2JSMAATR/450-1792-1-ND/3503931, TypeButton="Tactile button", ValueManufacturerPartNumber="Tactile button, 6x6mm"
SW1 SW2: library part Encoder_PEC12, Manufacturer=Bourns, PartNumber=PEC12R-4115F-S0012, HelpURL=https://www.digikey.com/product-detail/en/bourns-inc/PEC12R-4115F-S0012/PEC12R-4115F-S0012-ND/6153386, SeriesEncoder=PEC12R, TypeEncoder="Quadrature encoder", ValueManufacturerPartNumber="Quadrature encoder, PEC12R"
U1: "Double Channel Single-Supply Operation Operational Amplifier, 220 MHz BW, 170 V/us SR, Industrial, 8-pin SOIC (R-8), Reel", Amplifiers Per Package=2, Generic Part Number=ADA4891-2, Input Bias Current=2pA, Input Offset Voltage=2.5mV, Manufacturer="Analog Devices", Supplier Part Number 1=ADA4891-2ARZ-RL-ND, Code_JEDEC=MS-012-AA, ComponentLink1Description="Manufacturer URL", ComponentLink1URL=http://www.analog.com/en/index.html, ComponentLink2Description=Datasheet, ComponentLink2URL=http://www.analog.com/static/imported-files/data_sheets/ADA4891-1_4891-2_4891-3_4891-4.PDF, ComponentLink3Description="Package Specification", ComponentLink3URL=http://www.analog.com/static/imported-files/packages/PKG_PDF/SOIC_Narrow%20(R)/R_8.pdf, DatasheetVersion="Rev. D", Iq/Amp=4.4mA, Mounting Technology="Surface Mount", PackageDescription="8-Pin Standard Small Outline Package, Body 3.9 x 4.9 mm, Pitch 1.27 mm", PackageReference=R-8, PackageVersion=060506-A, Packing=Reel, PartNumber=ADA4891-2ARZ-RL, Slew Rate=170V/us, Small Signal Bandwidth=220MHz, Supplier 1=Digi-Key, V Span Max=5.5V, V Span Min=2.7V
U2: "1A, Low Drop Positive Voltage Regulator, 3.3V, 4-Pin SOT-223, Tape and Reel", ComponentLink1Description="Manufacturer URL", ComponentLink1URL=http://www.st.com, ComponentLink2Description=Datasheet, ComponentLink2URL=http://www.st.com/internet/com/TECHNICAL_RESOURCES/TECHNICAL_LITERATURE/DATASHEET/CD00002116.pdf, DatasheetVersion=Dec-2011, PackageDescription="4-Pin SOT-223 Package, 6.5 x 3.5 mm Body, 2.3 mm Pitch, 7 mm Lead Span", PackageReference=SOT-223, PackageVersion=2010, PartNumber=LD1117AS33TR
U?: library part ESP32_MODULE_0
X1: library part PLD-20, CurrentMax=3A, Manufacturer=Connfly, VoltageMax=500VAC, CommentText="\"Ðàçúåì\"", HelpURL=https://www.chipdip.ru/product/pld-20, Multichannel=20pin, PartNumber=PLD-20, Pitch=2.54mm, TypeConnector=Connector, ValueManufacturerPartNumber="Connector, 20pin, 2.54mm, 500VAC, 3A"
X2 X5: library part PLS-3, CurrentMax=3A, Manufacturer=Connfly, VoltageMax=500VAC, CommentText="\"Ðàçúåì\"", HelpURL=https://www.chipdip.ru/product/pls-3, Multichannel=3pin, PartNumber=PLS-3, Pitch=2.54mm, TypeConnector=Connector, ValueManufacturerPartNumber="Connector, 3pin, 2.54mm, 500VAC, 3A"
X3 X4: library part PLD-14, CurrentMax=3A, Manufacturer=Connfly, VoltageMax=500VAC, HelpURL=https://www.chipdip.ru/product/ds1021-2-7-sf11-pld-14, Multichannel=14pin, PartNumber=PLD-14, Pitch=2.54mm, TypeConnector=Connector, ValueManufacturerPartNumber="Connector, 14pin, 2.54mm, 500VAC, 3A"
  X3: CommentText="\"Ðàçúåì\""
  X4: CommentText=LAN8720
X6 X7: library part PLS-4, CurrentMax=3A, Manufacturer=Connfly, VoltageMax=500VAC, CommentText="\"Ðàçúåì\"", HelpURL=https://www.chipdip.ru/product/pls-4, Multichannel=4pin, PartNumber=PLS-4, Pitch=2.54mm, TypeConnector=Connector, ValueManufacturerPartNumber="Connector, 4pin, 2.54mm, 500VAC, 3A"
X8: library part Connector_USB_mini_B, Manufacturer=Molex, PartNumber=0675031020, CommentText="\"USB\"", HelpURL=https://www.digikey.com/product-detail/en/molex/0675031020/WM5461CT-ND/1624427, TypeConnector="USB mini B", ValueManufacturerPartNumber="USB mini B"
X9 X10 X11 X17: library part PLS-2, CurrentMax=3A, Manufacturer=Connfly, VoltageMax=500VAC, CommentText="\"Ðàçúåì\"", HelpURL=https://www.chipdip.ru/product/pls-2, Multichannel=2pin, PartNumber=PLS-2, Pitch=2.54mm, TypeConnector=Connector, ValueManufacturerPartNumber="Connector, 2pin, 2.54mm, 500VAC, 3A"
Y1: "Crystal Oscillator", LatestRevisionDate=17-Jul-2002, LatestRevisionNote="Re-released for DXP Platform.", PackageDescription="Crystal, Thru-Hole; 2 Leads; Body 3.1 x 8.2 mm (Dia.xH)", PackageReference=R38, Published=8-Jun-2000, Publisher="Altium Limited"
Z1: library part Crystal_3215, Frequency=32.768kHz, LoadCapacitance=12.5pF, Manufacturer=Epson, Package="case 3215", PartNumber="FC-135 32.7680KA-A5", Temperature=-40...+85°C, Tolerance=±20ppm, HelpURL=https://www.digikey.com/product-detail/en/epson/FC-135-32.7680KA-A5/SER4103CT-ND/6188447, TypeOscilator=Crystal, ValueManufacturerPartNumber="Crystal, 32.768kHz, 12.5pF, ±20ppm, case 3215, -40...+85°C"

## Via types
v1: diameter 1.27, hole 0.711, Top Layer to Bottom Layer, 151 vias
v2: diameter 0.6, hole 0.3, Top Layer to Bottom Layer, 12 vias

## Nets (pads, with @x,y where several pads share a name; then routed paths per layer and width w, separated by ;. In a path a pad name is that pad's centre, name@x,y a point inside that pad or via, vN(x,y) a via of type N, cw(c..) or ccw(c..) an arc to the next point about the centre after c; other vN are vias at no path point)
CLK: D1.78 X1.2 | length 59
  Top Layer w0.254: D1.78 60.5,55.5 64.5,59.5 66,59.5 74.5,51 v1(74.5,47.5)
  Bottom Layer w0.254: v1(74.5,47.5) 74.5,50 79.5,55 81,55 83,57 83,59.5 83.5,60 85.5,60 87.25,61.75 94.5,61.75 95,61.25 X1.2
CS: D1.88 X3.13 | length 122.9
  Top Layer w0.254: v1(55,67) 55,65 55.5,64.5 D1.88 ; v1(57.5,62.5) 58.5,62.5 64.5,68.5 66,68.5 78.5,56 81.5,56 86,60.5 v1@87.5,60.5 ; v1(73.5,38) 73.5,35.75 74.25,35 v1(74.25,32.75) ; v1(75.75,23.25) 82.74,16.26 X3.13
  Bottom Layer w0.254: v1(55,67) 55,66 57.5,63.5 v1(57.5,62.5) ; v1(73.5,38) 73.5,40.75 76.5,43.75 76.5,49 v1(88,60.5) ; v1(74.25,32.75) 74.25,29.75 75.75,28.25 v1(75.75,23.25)
DATA0: D1.61 X3.10 | length 48.2
  Top Layer w0.254: D1.61 66.5,44.5 70,41 v1@79.5,41 ; v1(80.5,36.75) 80.5,33.25 v1(81,32.75)
  Bottom Layer w0.254: v1(79.5,40.75) 79.5,38.5 80.5,37.5 v1(80.5,36.75) ; v1(81,32.75) 81,27.5 85.859,22.641 93.739,22.641 X3.10
DATA1: D1.62 X3.7 | length 45.1
  Top Layer w0.254: D1.62 67,45 70,42 v1@81.25,42 ; v1(82.25,37.25) 82.25,33.75 v1@83,33
  Bottom Layer w0.254: v1(81.5,41.75) 81.5,38.5 82.25,37.75 v1(82.25,37.25) ; v1(83.25,33) 83.25,27.25 86.5,24 92.38,24 X3.7
DATA2: D1.81 X3.8 | length 73.2
  Top Layer w0.254: D1.81 59,57 64.5,62.5 66,62.5 78.5,50 80.5,50 v1@82.25,48.25 ; v1(84.75,37.5) 84.75,36.25 86.75,34.25 v1@89.5,34.25 ; v1(87.25,41.5) 88.5,42.75 v1(89.25,42.75)
  Bottom Layer w0.254: v1(82.5,48.5) 83.25,48.5 89,42.75 v1(89.25,42.75) ; v1(84.75,37.5) 85.75,38.5 85.75,39.5 87.25,41 v1(87.25,41.5) ; v1(89.5,34) 89.5,26 90.35,25.15 93.77,25.15 X3.8
DATA3: D1.82 X3.5 | length 74.5
  Top Layer w0.254: D1.82 58.5,57.5 64.5,63.5 66,63.5 78.5,51 82.5,51 v1@83.25,50.25 ; v1(83.5,38.75) 83.5,36 86.5,33 v1(87.75,33) ; v1(85.75,43) 87.5,44.75 v1(89,44.75) ; v1(87.5,26.25) 92.33,26.25 X3.5
  Bottom Layer w0.254: v1(83.5,38.75) 85.75,41 v1(85.75,43) ; v1(83.5,50.5) 89,45 v1(89,44.75) ; v1@87.25,26.25 87.75,26.75 v1(87.75,33)
DATA4: D1.37 X3.6 | length 47
  Top Layer w0.254: D1.37 55,34 59,30 70,30 71,29 87.5,29 88.75,27.75 93.71,27.75 X3.6
DATA5: D1.38 X3.3 | length 42.6
  Top Layer w0.254: D1.38 55.5,34.5 59.5,30.5 70.5,30.5 71,30 88,30 89.04,28.96 X3.3
DATA6: D1.39 X3.4 | length 44.3
  Top Layer w0.254: D1.39 56,35 60,31 71,31 71.25,30.75 89,30.75 89.547,30.203 93.797,30.203 X3.4
DATA7: D1.40 X3.1 | length 40
  Top Layer w0.254: D1.40 56.5,35.5 60.5,31.5 X3.1
DM: D1.70 X8.2 | length 38.4
  Top Layer w0.254: D1.70 66.5,49 69,51.5 v1(69,53.5) ; v1(77,62.5) 77,64 78.25,65.25 80,67 85,67 86,68 87.5,68 88.1,67.4 X8.2
  Bottom Layer w0.254: v1(69,53.5) 69,54 77,62 v1(77,62.5)
DP: D1.71 X8.3 | length 39.8
  Top Layer w0.254: D1.71 65.5,49.5 67.5,51.5 v1(67.5,52) ; v1(75,64) 75,64.5 76.5,66 77.563,66 79.563,68 84.5,68 85.5,69 88,69 88.8,68.2 X8.3
  Bottom Layer w0.254: v1(67.5,52) 67.5,54.5 70,57 70.5,57 71.5,58 71.5,61 74.5,64 v1(75,64)
E_CLK: D1.42 U?.20 | length 17.6
  Top Layer w0.254: v1(57,40) 57,39 57.5,38.5 D1.42
  Bottom Layer w0.254: v1(57,40) 57,39 55.5,37.5 55.5,30.5 57.3,28.7 U?.20
E_CS: D1.45 U?.19 | length 24.5
  Top Layer w0.254: v1(56,28) 56.5,28.5 v1(61.5,28.5) ; D1.45 59,36 59.5,35.5 v1(59.5,34.5)
  Bottom Layer w0.254: v1(56,28) 56.03,27.97 U?.19 ; v1(59.5,34.5) 60.5,35.5 63.5,35.5 65,34 65,32 v1(61.5,28.5)
EMISO: D1.43 U?.21 | length 29.1
  Top Layer w0.254: v1@58,36 D1.43
  Bottom Layer w0.254: v1(58,35.5) 58.5,35.5 59.5,36.5 64,36.5 66,34.5 66,30 63.5,27.5 63.5,24.5 63,24 59,24 58.57,24.43 U?.21
EMOSI: D1.44 U?.22 | length 17.4
  Top Layer w0.254: D1.44 v1(58.5,39.5)
  Bottom Layer w0.254: v1(58.5,39.5) 58.5,38.5 56.5,36.5 56.5,35.5 60,32 60,26.325 U?.22
ERx: U?.34 X9.2 | length 15.7
  Bottom Layer w0.254: U?.34 67.265,13.735 75.27,5.73 X9.2
Et_CLK: D1.23 X4.8 | length 58.1
  Top Layer w0.254: v1(43,36) 43,37.5 46,40.5 D1.23
  Bottom Layer w0.254: X4.8 4.27,11.73 8.73,11.73 22.5,25.5 32.5,25.5 v1(43,36)
Et_CRS: D1.31 X4.7 | length 62.6
  Top Layer w0.254: v1(34.5,17.5) 34.5,19.5 43.5,28.5 49,28.5 52,31.5 D1.31
  Bottom Layer w0.254: X4.7 9.46,10.46 16.5,17.5 v1(34.5,17.5)
Et_MDC: D1.16 X4.9 | length 59.2
  Top Layer w0.254: X4.9 6,13 8,15 8,15.5 26.5,34 26.5,40.5 28,42 39,42 40,43 42.5,43 43.5,44 D1.16
Et_MDIO: D1.24 X4.10 | length 57.4
  Top Layer w0.254: v1(10,15.5) 24.5,15.5 v1(41.5,32.5) ; v1(45,36) 45,38.5 46.5,40 D1.24
  Bottom Layer w0.254: X4.10 4.27,14.27 7.77,14.27 9,15.5 v1(10,15.5) ; v1(41.5,32.5) v1(45,36)
Et_RX0: D1.32 X4.6 | length 67.6
  Top Layer w0.254: v1(36.5,17.5) 36.5,20 44,27.5 49,27.5 52.5,31 D1.32
  Bottom Layer w0.254: X4.6 4.27,9.19 10.19,9.19 17,16 35.5,16 36.5,17 v1(36.5,17.5)
Et_RX1: D1.33 X4.5 | length 66.5
  Top Layer w0.254: v1(39,17.5) 39,21 44.5,26.5 49.5,26.5 53,30 D1.33
  Bottom Layer w0.254: X4.5 10.42,7.92 17.5,15 36.5,15 v1(39,17.5)
Et_TX0: D1.51 X4.3 | length 96.9
  Top Layer w0.254: X4.3 8.88,5.38 12,8.5 27.5,8.5 31.5,4.5 41.5,4.5 43,6 43,11 45.5,13.5 45.5,17.5 52.5,24.5 60,24.5 64,28.5 v1(69.5,28.5) ; D1.51@63.2,39.469 63.5,39.169 v1(63.5,38.5)
  Bottom Layer w0.254: v1(63.5,38.5) 66.5,35.5 68.5,35.5 69,35 69,29 v1(69.5,28.5)
Et_TX1: D1.52 X4.2 | length 87.6
  Top Layer w0.254: v1(61.5,40.5) 62,40 D1.52
  Bottom Layer w0.254: X4.2 3,2 4,1 8,1 11.5,4.5 12,4.5 18,10.5 37,10.5 41,14.5 41,28 55.5,42.5 59.5,42.5 v1(61.5,40.5)
Et_TXEN: D1.47 X4.4 | length 108.1
  Top Layer w0.254: X4.4@3.5,5.5 3.38,5.38 X4.4 1.5,3.88 1.5,1.5 2,1 8,1 14.5,7.5 27,7.5 31,3.5 42.5,3.5 46.5,7.5 46.5,16.5 53.5,23.5 60.5,23.5 64,27 v1(68.5,27) ; D1.47 60,37 v1@63,34 ; v1(63,33.5) v1(67.5,33.5)
  Bottom Layer w0.254: v1(67.5,33.5) 67.5,28 v1(68.5,27)
ETx: U?.35 X9.1 | length 12.9
  Bottom Layer w0.254: U?.35 66.535,12.465 72.73,6.27 X9.1
GND: BF1.2 BT1.1 C1.2 C2.2 C3.1 C4.2 C5.2 C6.2 C7.2 C8.1 C9.2 C10.2 C11.1 C12.1 C13.1 C14.1 C15.1 D1.10 D1.19 D1.26 D1.49 D1.74 D1.99 J1.4 R1.1 R22.2 SB1.1 SW1.2 SW1.4 SW2.2 SW2.4 SX1.6 U1.4 U2.1 U?.1 U?.15 U?.39 X1.7 X1.8 X1.10 X4.11 X4.12 X6.4 X7.1 X8.0 X8.4 X11.1 X11.2 X17.2 | length 323.1
  Top Layer w0.254: v1@8,40 v1(8.25,40.25) ; C1.2 24.23,90.22 J1.4 ; v1(31,36.5) v1@31.3,36.5 ; C7.2 v1@31.3,36.5 ; C8.1 32.55,37.25 31.75,37.25 31.3,36.8 v1@31.3,36.5 ; C5.2@33.05,46.75 C5.2 ; C6.2 C5.2 ; X6.4 36.25,12.5 41,17.25 41,18.75 42.5,20.25 v1(42.5,21.5) ; 35.75,39.75 36,40 41.5,40 44,42.5 D1.19 49.5,42.5 D1.26 ; C9.2 C10.2 36.55,48.75 34.1,48.75 33.3,47.95 C5.2 ; BF1.2 44.75,66.25 44.75,60.5 50,55.25 D1.99 ; v1(44.75,47.25) 45,47 D1.10 ; X7.1 46.46,90.54 49.5,87.5 v1(50,87.5) ; v1(48,37) 48.5,37.5 49.169,37.5 D1.26@49.469,37.8 ; D1.49 61,37 63,35 64.5,35 v1(67,37.5) ; D1.74 64,51 64.5,51.5 64.5,55.5 v1(64,56) ; SX1.6 69.9,84.4 v1(71.5,86) ; X8.0@90.2,72.5 X8.0@90.8,73.1 ; SW2.4 95.58,83.42 98.5,80.5 98.5,76.5 97.8,75.8 C2.2 X8.0@96,73.5 ; v1@97.42,46.58 v1(97.5,46.5)
  Top Layer w0.4: v1(87,72.5) X8.0@90.2,72.5 ; X8.0@90.8,63.3 95.9,63.3 95.9,73.1 90.8,73.1 X8.4
  Top Layer w0.5: v1(3.5,40) v1@8,40 ; v1(19,39.75) v1(19,43) ; v1(30.25,46.75) C5.2@33.05,46.75 ; X1.7 X1.8 X1.10 v1@97.42,46.58
  Bottom Layer w0.254: BF1.2 38.5,69.95 R1.1 ; v1(48,37) 48,38 52.75,42.75 53.5,43.5 56.25,43.5 57,44.25 57,46.75 57.75,47.5 59,47.5 59.5,47.5 60.5,46.5 63,46.5 67,42.5 v1(67,37.5) ; v1(50,87.5) 50,80 64,66 v1(64,56) ; v1@53.582,15 v1(53.83,15.248) ; v1(71.5,86) 80.038,86 SW2.2 82.04,85.96 83,85 83,74.4 U2.1
  Bottom Layer w0.4: X4.12 X4.11 6.54,15.54 7.25,16.25 7.5,16.25 ; v1@52,43.25 52.5,42.75 52.75,42.75 ; 59,47.5 59,48 61.125,50.125 ; C14.1 C15.1 C13.1 71.7,65.5 76.25,65.5 77.5,64.25 78.75,64.25 81.2,61.8 C12.1 C11.1 85.8,61.8 87.5,63.5 v1(88.5,63.5) ; U2.1 85.3,70.8 v1(87,72.5)
  Bottom Layer w0.5: v1(51.25,15) v1@53.582,15
  other v1: 93.75,3 31.25,7.5 91.25,9 20.25,13 54.747,14.33 56.582,14.33 55.665,15.248 57.5,15.248 54.747,16.165 56.582,16.165 53.83,17.083 55.665,17.083 57.5,17.083 12.5,17.5 54.747,18 56.582,18 26.25,20.25 33.75,30 51.75,43.5 20.5,46.5 53.5,49.25
  other v2: 54.747,14.33 56.582,14.33 53.83,15.248 55.665,15.248 57.5,15.248 54.747,16.165 56.582,16.165 53.83,17.083 55.665,17.083 57.5,17.083 54.747,18 56.582,18
MISO: D1.79 X1.5 | length 46.4
  Top Layer w0.254: D1.79 60,56 64.5,60.5 66,60.5 75.5,51 78.5,48 79.5,48 81.25,46.25 83.25,46.25 86,49 86,51 86.66,51.66 X1.5
MOSI: D1.80 X1.6 | length 51.1
  Top Layer w0.254: D1.80 59.5,56.5 64.5,61.5 66,61.5 78.5,49 80,49 82,47 83,47 85,49 85,51 87,53 93.66,53 X1.6
NetBF1_1: BF1.1 D1.96 | length 23.4
  Top Layer w0.254: BF1.1 47,68 47,63 52,58 52,55 51.5,54.5 D1.96
NetBT1_2: BT1.2 D1.6 | length 40.1
  Top Layer w0.254: BT1.2 23.28,43.764 23.5,43.984 v1(23.5,45) ; D1.6 49,49 v1(49.5,48.5)
  Bottom Layer w0.254: v1@23.141,44.641 23.29,44.492 23.71,44.492 24.218,45 31.75,45 35.25,48.5 v1(49.5,48.5)
NetC1_1: C1.1 D1.18 R7.1 SW1.5 | length 82.5
  Top Layer w0.254: C1.1 17.797,90.747 SW1.5 21,84.947 21,82.5 25,78.5 v1(25,39.5) ; R7.1 31.7,40.5 41.2,40.5 43.7,43 D1.18
  Bottom Layer w0.254: v1(25,39.5) v1(31.5,39.5)
NetC2_1: C2.1 D1.66 R20.1 SW2.5 | length 82.4
  Top Layer w0.254: D1.66 70,47 v1(72,49) ; v1(81.5,58.5) 80.5,58.5 80,59 78,59 72.5,64.5 72.5,69.5 75.5,72.5 80.5,72.5 82,74 R20.1 85.5,75 86,75.5 92,75.5 93.7,77.2 C2.1 96,79.5 95.5,80 94,80 92.5,81.5 92.5,86 SW2.5
  Bottom Layer w0.254: v1(72,49) 79,56 80.5,56 81.5,57 v1(81.5,58.5)
NetC3_2: C3.2 R19.1 R22.1 U1.3 | length 25.3
  Bottom Layer w0.254: U1.3 12.985,63.95 C3.2 18.8,63.95 19.25,63.5 19.25,60.5 18.75,60 14.5,60 14.25,59.75 14.25,57.75 14.7,57.3 R19.1 16.25,57.05 R22.1
NetC4_1: C4.1 D1.14 R23.2 SB1.2 | length 58.5
  Top Layer w0.254: SB1.2@8.25,49.75 SB1.2@8.25,56.25 ; D1.14 v1(49.5,45)
  Bottom Layer w0.254: R23.2@6,47.5 C4.1@9,47.5 ; SB1.2@8.25,49.75 8.25,48.5 9,47.75 C4.1@9,47.5 ; C4.1 C4.1@9,47.5 ; v1(49.5,45) 44.5,45 41,41.5 16.5,41.5 10.5,47.5 C4.1@9,47.5
NetC5_1: C5.1 R25.1 Y1.1 | length 6.1
  Top Layer w0.254: C5.1 37.95,46.5 Y1.1 R25.1@40.75,46.55
NetC6_1: C6.1 R26.1 Y1.2 | length 6.3
  Top Layer w0.254: C6.1 37.95,43.5 Y1.2 38.95,43.45 39.5,44 40,44 R26.1@40.5,44.5
NetC7_1: C7.1 C8.2 D1.20 R27.1 | length 18
  Top Layer w0.254: C7.1 C8.2 35.7,39 R27.1 39,39.5 42,39.5 44.5,42 D1.20
NetC9_1: C9.1 D1.8 Z1.2 | length 11
  Top Layer w0.254: C9.1 41.75,51.5 Z1.2 42.25,51 43,51 43.5,50.5 44.5,50.5 46.25,48.75 47,48 D1.8
NetC10_1: C10.1 D1.9 Z1.1 | length 10.4
  Top Layer w0.254: C10.1 41.75,49 Z1.1 42.25,49 45,49 46.5,47.5 D1.9
NetD1_1: D1.1 R8.2 | length 10.3
  Top Layer w0.254: D1.1@47.75,51.5 v1(47.75,54.5)
  Bottom Layer w0.254: R8.2 45.7,57.3 47.75,55.25 v1(47.75,54.5)
NetD1_2: D1.2 R11.2 | length 15.4
  Top Layer w0.254: v1(46,54.75) 46.25,54.5 46.25,51.5 46.75,51 D1.2
  Bottom Layer w0.254: R11.2 44.05,51.05 46,53 v1(46,54.75)
NetD1_3: D1.3 R14.2 | length 18.2
  Top Layer w0.254: v1(44.25,55.5) 44.25,54.5 45.5,53.25 45.5,51.25 46.25,50.5 D1.3
  Bottom Layer w0.254: R14.2 34.2,55.25 39.75,55.25 40,55.5 v1(44.25,55.5)
NetD1_4: D1.4 R16.2 | length 22.9
  Top Layer w0.254: v1(43,54.25) 44.5,52.75 44.5,51.5 46,50 D1.4
  Bottom Layer w0.254: R16.2 34.75,53 36,54.25 v1(43,54.25)
NetD1_5: D1.5 R18.2 | length 21.5
  Top Layer w0.254: D1.5 49,49.5 v1(49.75,50.25)
  Bottom Layer w0.254: R18.2 31.2,49.5 46,49.5 46.75,50.25 v1(49.75,50.25)
NetD1_12: D1.12 R25.2 | length 5.8
  Top Layer w0.254: R25.2 43,46.5 43.5,46 D1.12
NetD1_13: D1.13 R26.2 | length 5.9
  Top Layer w0.254: R26.2@42.35,44.35 43,45 46.5,45 47,45.5 D1.13
NetD1_21: D1.21 L1.1 R27.2 | length 14.6
  Top Layer w0.254: L1.1 38.3,37.4 R27.2 41.1,37.6 45,41.5 D1.21
NetD1_25: D1.25 R2.1 SW1.1 | length 105.8
  Top Layer w0.254: SW1.1@3,88 4.5,88 6.5,86 6.5,75.5 11.5,70.5 11.5,40 v1(20,31.5) ; v1(28,27) 28,25.5 v1(29.5,24) ; v1(45,34) 45.2,34 46.5,35.3 ; R2.1 46.5,35.3 ; D1.25@47.8,39.469 47.469,39.469 46.5,38.5 46.5,35.3
  Bottom Layer w0.254: v1(20,31.5) 24.5,27 v1(28,27) ; v1@30,24 35,24 v1(45,34)
NetD1_67: D1.67 R13.1 SW2.1 | length 61.5
  Top Layer w0.254: D1.67 69,47.5 v1@70.25,48.75 ; v1(75,77.5) 75,74 71,70 71,65 78.5,57.5 v1(79.5,57.5) ; v1(78,80.5) 78,81.5 77.4,82.1 R13.1 SW2.1
  Bottom Layer w0.254: v1(70,49) 78.5,57.5 v1(79.5,57.5) ; v1(75,77.5) v1(78,80.5)
NetD1_94: D1.94 R24.2 | length 22.4
  Top Layer w0.254: R24.2 47,72 48,71 48,63.5 52.5,59 D1.94
NetD1_97: D1.97 R3.2 | length 10.5
  Top Layer w0.254: v1(50.5,57.5) 51,57 D1.97
  Bottom Layer w0.254: R3.2 50.5,63.45 v1(50.5,57.5)
NetD1_98: D1.98 R5.2 | length 7.7
  Top Layer w0.254: v1@48.5,58.5 48.5,57.75 50.5,55.75 D1.98
  Bottom Layer w0.254: R5.2 48.5,59.3 v1(48.5,58.75)
NetJ1_1: J1.1 J1.3 R24.1 | length 28.6
  Top Layer w0.254: J1.3 J1.1 32.27,86.23 33,85.5 38,85.5 47,76.5 R24.1
NetR1_2: R1.2 R3.1 R4.2 | length 8.4
  Bottom Layer w0.254: R1.2 42.15,65.55 R4.2 44.3,63.5 R3.1
NetR4_1: R4.1 R5.1 R6.2 | length 8.1
  Bottom Layer w0.254: R6.2 44.1,62.2 R4.1 44.85,61.45 R5.1
NetR6_1: R6.1 R8.1 R9.2 | length 5.7
  Bottom Layer w0.254: R9.2 38.1,58.9 R6.1 42,58.8 R8.1
NetR9_1: R9.1 R11.1 R12.2 | length 7.8
  Top Layer w0.254: v1(38.5,56.5) 39.25,55.75 v1(39.25,53)
  Bottom Layer w0.254: R12.2 35.8,57 37.5,57 R9.1 38.5,57 v1(38.5,56.5)
NetR10_1: R10.1 SW1.3 | length 8.2
  Top Layer w0.254: SW1.3 2.875,75.225 R10.1
NetR12_1: R12.1 R14.1 R15.2 | length 7.4
  Bottom Layer w0.254: R14.1 32.3,58.6 R15.2 35.45,58.75 R12.1
NetR15_1: R15.1 R16.1 R17.2 | length 12.9
  Bottom Layer w0.254: R17.2 25.05,52.8 25.25,53 R16.1 26.55,54.95 30.35,58.75 R15.1
NetR17_1: R17.1 R18.1 R19.2 | length 22.3
  Bottom Layer w0.254: R19.2 17.8,58.7 21.5,55 R17.1 20.45,54.2 20,53.75 20,51 21.25,49.75 R18.1
NetR21_1: R21.1 SW2.3 | length 10.4
  Bottom Layer w0.254: R21.1 80.078,79.877 SW2.3
NetU1_1: U1.1 U1.2 X17.1 | length 23.2
  Bottom Layer w0.254: X17.1 4.25,65.5 5.5,64.25 5.5,62.5 6.5,61.5 10,61.5 10.5,62 10.5,65 10.635,65.135 U1.2 15.385,65.135 15.5,65.25 15.5,66.25 15.345,66.405 U1.1
PA4: D1.28 X6.1 | length 39.5
  Top Layer w0.254: X6.1 26.19,15.69 42,31.5 49,31.5 50.5,33 D1.28
PA5: D1.29 X6.2 | length 38.3
  Top Layer w0.254: X6.2 28.73,16.73 42.5,30.5 49,30.5 51,32.5 D1.29
PA6: D1.30 X6.3 | length 37.2
  Top Layer w0.254: X6.3 31.27,17.77 43,29.5 49,29.5 51.5,32 D1.30
PA10: D1.69 X3.2 | length 52.1
  Top Layer w0.254: v1(61,48) 61.5,48.5 D1.69
  Bottom Layer w0.254: v1(61,48) 68.5,48 70,46.5 70,38 72.5,35.5 81.25,35.5 81.625,35.125 95.875,35.125 96.5,34.5 96.5,32.96 X3.2
PB0: D1.34 X5.1 | length 38.5
  Top Layer w0.254: X5.1 34.96,9.46 37.5,12 37.5,12.5 43,18 43,19 53.5,29.5 D1.34
PB1: D1.35 X5.2 | length 37.6
  Top Layer w0.254: X5.2 37.5,10.5 43.75,16.75 43.75,18.75 54,29 D1.35
PB2: D1.36 X5.3 | length 36.8
  Top Layer w0.254: X5.3 40.04,10.54 44.5,15 44.5,18.5 54.5,28.5 D1.36
PB5: D1.91 X2.1 | length 47.9
  Top Layer w0.254: X2.1@38.5,93 53,78.5 53,72 51,70 51,65 54,62 D1.91
PB6: D1.92 X2.2 | length 49.9
  Top Layer w0.254: X2.2 35.5,91 36.5,90 39,90 52,77 52,72.5 50,70.5 50,64.5 53.5,61 D1.92
PB7: D1.93 X2.3 | length 50.7
  Top Layer w0.254: X2.3 32.96,91.04 35.5,88.5 38,88.5 51,75.5 51,73 49,71 49,64 53,60 D1.93
PC6: D1.63 X1.18 | length 35.6
  Top Layer w0.254: D1.63 67.5,45.5 70,43 83,43 88.277,37.723 93.697,37.723 X1.18
PC7: D1.64 X1.19 | length 39.2
  Top Layer w0.254: D1.64 68.5,46 70.25,44.25 83,44.25 87.5,39.75 v1(88,39.75) ; v1(86.25,36.5) 87.5,35.25 91.09,35.25 X1.19
  Bottom Layer w0.254: v1(86.25,36.5) 88,38.25 v1(88,39.75) v1@88.5,39.75
PC8: D1.65 X1.20 | length 47.4
  Top Layer w0.254: D1.65 69.5,46.5 70.5,45.5 83.75,45.5 85.75,47.5 88.75,47.5 90.5,45.75 90.5,43.25 91,42.75 96,42.75 96.75,42 96.75,35.63 X1.20
PD12: D1.59 X1.16 | length 42.8
  Top Layer w0.254: D1.59 65.5,43.5 69.75,39.25 76.25,39.25 v1(77.25,38.25)
  Bottom Layer w0.254: v1(77.25,38.25) 77.25,41.25 80.75,44.75 85.5,44.75 90.75,39.5 90.75,38 91.094,37.656 93.696,37.656 X1.16
PD13: D1.60 X1.17 | length 33.2
  Top Layer w0.254: D1.60 66,44 70,40 77.25,40 77.75,39.5 78.812,39.5 79.312,39 81.5,39 82.5,40 84.75,40 88.33,36.42 X1.17
PEN: D1.83 X1.3 | length 48
  Top Layer w0.254: D1.83 58,58 64.5,64.5 66,64.5 78.5,52 84,52 86.2,54.2 X1.3
RD: D1.85 X3.12 | length 103.4
  Top Layer w0.254: D1.85 57,59 64.5,66.5 66,66.5 78.5,54 82.5,54 86,57.5 88.5,57.5 90,59 91,59 92.5,60.5 97.75,60.5 99.25,59 99.25,20 98.05,18.8 X3.12
RS: D1.58 X3.14 | length 67.5
  Top Layer w0.254: D1.58 65,43 72.25,35.75 72.25,35 v1(73,34.25)
  Bottom Layer w0.254: v1(73,34.25) 73,29.5 74,28.5 74,13 80.5,6.5 92.5,6.5 95,9 95,16.22 X3.14
RST: D1.77 X3.9 | length 67.4
  Top Layer w0.254: D1.77 61,55 64.5,58.5 66,58.5 73.5,51 73.5,48.5 v1@72.125,47.125 ; v1(78.25,32.75) 78.25,33.75 78.75,34.25 v1(78.75,36.75) ; v1(79.25,26) 83.25,26 87.91,21.34 X3.9
  Bottom Layer w0.254: v1(72.25,47) 72.25,41.5 71.75,41 71.75,37.25 72.75,36.25 77.75,36.25 78.25,36.75 v1(78.75,36.75) ; v1(78.25,32.75) 78.25,27 v1(79.25,26)
SD_CLK: D1.87 SX1.5 | length 32.1
  Top Layer w0.254: D1.87 56,65.7 68.8,78.5 SX1.5
SD_CMD: D1.22 SX1.3 | length 68.4
  Top Layer w0.254: v1(41,36) 41,36.5 45.5,41 D1.22 ; v1(55,69.5) 55,70 59,74 60.5,74 62.5,76 63.5,76 64.5,77 65.5,77 66.6,78.1 SX1.3
  Bottom Layer w0.254: v1(41,36) 47.5,42.5 49,42.5 55,48.5 55,64 53,66 53,67.5 v1(55,69.5)
SD_D0: D1.53 SX1.7 | length 54.1
  Top Layer w0.254: v1(58.5,46) v1(58.5,51) ; v1@60.25,66.25 60.25,66.75 67,73.5 v1(69.5,73.5) ; D1.53 64.5,40.5 v1(65.5,39.5) ; v1(70.5,78) 70.5,78.5 71,79 SX1.7
  Bottom Layer w0.254: v1(58.5,46) 59.5,46 61,44.5 62,44.5 65.5,41 v1(65.5,39.5) ; v1(58.5,51) 58.5,58 60,59.5 v1(60,66.5) ; v1(69.5,73.5) 70.5,74.5 v1(70.5,78)
SD_D1: D1.54 SX1.8 | length 52.4
  Top Layer w0.254: v1(56.5,50) 56.75,49.75 56.75,45.75 v1(58.5,44) ; v1(58,66) 58,66.5 67.5,76 71,76 72,77 72,79.9 SX1.8 ; v1(61.5,42.5) 61.5,42 62.5,41 D1.54
  Bottom Layer w0.254: v1(56.5,50) 56.5,58.5 59,61 59,64.5 58,65.5 v1(58,66) ; v1(58.5,44) 59.5,44 61,42.5 v1(61.5,42.5)
SD_D2: D1.89 SX1.1 | length 34
  Top Layer w0.254: D1.89 55,57 55,64 53,66 53,69.5 59,75.5 v1(60,75.5) ; v1(61.5,78.5) 63.1,78.5 64.5,79.9 SX1.1
  Bottom Layer w0.254: v1(60,75.5) 60,77 v1(61.5,78.5)
SD_D3: D1.90 SX1.2 | length 36.4
  Top Layer w0.254: D1.90 54.5,63 52,65.5 52,70 59,77 63,77 64,78 65,78 65.5,78.5 SX1.2
SWCLK: D1.76 X7.2 | length 48.1
  Top Layer w0.254: D1.76 62.5,54.2 v1(62.5,55)
  Bottom Layer w0.254: X7.2@48.5,92 X7.2 49,91 46.5,88.5 46.5,82 61.516,66.984 61.516,56.016 62.5,55.032 v1(62.5,55)
SWDIO: D1.72 X7.3 | length 50.4
  Top Layer w0.254: D1.72 64.5,50 66,51.5 v1(66,56.5)
  Bottom Layer w0.254: X7.3 51.54,80.46 66,66 v1(66,56.5)
T_CS: D1.84 X1.1 | length 49.9
  Top Layer w0.254: D1.84 57.5,58.5 64.5,65.5 66,65.5 78.5,53 83,53 86.74,56.74 X1.1
U3Rx: D1.56 X10.2 | length 49.1
  Top Layer w0.254: D1.56 65,42 70,37 v1(70,36) ; v1(71.5,25) 71.5,21.5 86,7 86,3.73 X10.2
  Bottom Layer w0.254: v1(70,36) 70,30 71.5,28.5 v1(71.5,25)
U3Tx: D1.46 X10.1 | length 51.8
  Top Layer w0.254: D1.46 59.5,36.5 61,35 v1(61,33) 61.992,32.008 68.008,32.008 68.5,32.5 71,32.5 v1(71.5,33)
  Bottom Layer w0.254: v1(71.5,33) 71.5,29.5 73,28 73,12.5 82,3.5 X10.1
VBUS: C11.2 C12.2 D1.68 U2.3 X8.1 | length 51.7
  Top Layer w0.254: D1.68 67,48 69.5,50.5 70,50.5 70.5,51 v1(70.5,52) ; v1(79,61.25) 79,64 81,66 86.5,66 v1(87,66.5)
  Top Layer w0.4: v1(87,66.5) 87.1,66.6 X8.1
  Bottom Layer w0.254: v1(70.5,52) 70.5,52.5 79,61 v1(79,61.25) ; v1@86.7,66.2 v1(87,66.5)
  Bottom Layer w0.4: U2.3 82,66.2 ; C12.2 82,66.2 ; C11.2 85,66.2 ; v1@86.7,66.2 85,66.2 ; 82,66.2 85,66.2
VDD: C13.2 C14.2 C15.2 D1.11 D1.27 D1.50 D1.75 D1.100 J1.2 L1.2 R2.2 R7.2 R10.2 R13.2 R20.2 R21.2 R23.1 SX1.4 U1.8 U2.2 U2.4 U?.2 U?.3 X1.9 X1.11 X1.12 X4.13 X4.14 X7.4 | length 435.2
  Top Layer w0.3: R10.2 4.5,74.25 v1(9.25,69.5) 9.25,64 6,60.75 v1(6,48.75) ; R7.2@29.4,39.4 28.5,38.5 28.5,33.5 30,32 39.5,32 39.7,32.2 L1.2 39.95,33.75 42.75,33.75 44,32.5 48.5,32.5 49.2,33.2 R2.2 49.2,35.7 50,36.5 D1.27 50,39.35 50.65,40 53.75,40 55.5,41.75 v1@55.5,44.5 ; D1.11@48,46.5 51,46.5 ; v1(55.5,45) v1@55.5,44.5 ; D1.50 61.5,39 60,40.5 ; D1.75@63.2,51.554 62.054,51.554 59.531,49.031 59.531,47.5 60,47.031 60,40.5 ; SX1.4 67.7,82.7 v1(68,83) 68,86 70.5,88.5 R13.2 76,80 79.6,76.4 R20.2 ; v1@55.5,44.5 59.5,40.5 60,40.5
  Top Layer w0.4: J1.2 24.23,83.52 31.25,76.5 31.25,72.75 49.396,54.604 49.396,52.354 50.25,51.5 50.75,51.5 51,51.25 51,46.5 51,46 52,45 v1(55.5,45)
  Bottom Layer w0.3: X4.14 X4.13 5.54,20.54 6,21 R23.1 4.95,45.8 4.5,46.25 4.5,47.5 5.75,48.75 v1(6,48.75) ; U1.8 8.1,67.85 12,71.75 16.5,71.75 24.23,79.48 J1.2 ; U?.2 U?.3 45.805,11.195 44.25,12.75 44.25,28 54.75,38.5 v1(54.75,40.25) ; X7.4 54.08,83 ; v1(68,83) 54.08,83 ; U2.4@72.5,68.5 65.16,68.5 54.08,79.58 54.08,83 ; U2.4 73.6,74.8 R21.2 ; U2.2 95.25,68.5 97,66.75 97,48.5 96.35,47.85 93.73,47.85 X1.9 X1.11 X1.12
  Bottom Layer w0.4: v1(55.5,45) 55.5,47.75 56.5,48.75 57.25,48.75 58,49.5 59,49.5 60.25,50.75 60.25,51 63.25,54 65.5,54 68.5,57 68.5,61 68.5,64.5 72.5,68.5 U2.4 U2.2
WR: D1.86 X3.11 | length 111.5
  Top Layer w0.254: D1.86 56.5,59.5 64.5,67.5 66,67.5 78.5,55 82,55 85.5,58.5 88,58.5 v1(90,60.5) ; v1(75.5,37.5) 75.5,33.5 v1(76.25,32.75) ; v1(77.75,24.25) 83,24.25 88.45,18.8 X3.11
  Bottom Layer w0.254: v1(75.5,37.5) 75,38 75,40.5 77.5,43 77.5,48.5 88,59 88.5,59 v1(90,60.5) ; v1(76.25,32.75) 76.25,29.5 77,28.75 77,25 v1(77.75,24.25)
pads on no net: D1. D1.7 D1.15 D1.17 D1.41 D1.48 D1.55 D1.57 D1.73 D1.95 SW1. SW2. SX1.9 U1.5 U1.6 U1.7 U?.4 U?.5 U?.6 U?.7 U?.8 U?.9 U?.10 U?.11 U?.12 U?.13 U?.14 U?.16 U?.17 U?.18 U?.23 U?.24 U?.25 U?.26 U?.27 U?.28 U?.29 U?.30 U?.31 U?.32 U?.33 U?.36 U?.37 U?.38 X1.4 X1.13 X1.14 X1.15 X4.1 X8. X8.5
copper on no net: | length 0

## Polygon pours and split planes (outlines as drawn)
GND on Bottom Layer "TopLayPolygon2" (solid, pour order 10): 0.25,0.25 0.25,96.25 99.75,96.25 99.75,0.25
GND on Top Layer "TopLayPolygon2" (solid, pour order 8): 0.25,0.25 0.25,96.25 99.75,96.25 99.75,0.25

## Keep-outs
Keep-Out Layer:
  the board outline again, w0.254

## Silkscreen, mask and mechanical layers (free items; w line width, h text height)
Top Overlay:
  text "PC9" at 95.75,91 h1.2
  text "VDD" at 55.5,89.75 h1.2
  text "PB7" at 29.75,89.5 h1.2
  text "PB6" at 33.5,89.5 h1.2
  text "PB5" at 37.5,89.5 h1.2
  text "GND" at 43.5,89.5 h1.2
  text "SWCLK" at 47.5,89.5 h1.2
  text "GND" at 19.5,88 h1.2
  text "SWDIO" at 51,87.75 h1.2
  text "VDD" at 19.5,85.5 h1.2
  text "BOOT0" at 25.75,83 h1.2
  text "PA8" at 74.5,82.5 h1.2
  text "D2" at 62.5,77.75 h1.2
  text "CMD" at 65.25,77.75 h1.2
  text "CLK" at 69,77.75 h1.2
  text "D0" at 72.75,77.75 h1.2
  text "PA3" at 1.25,76.25 h1.2
  text "PC3" at 20,76 h1.2
  text "D3" at 63.75,76 h1.2
  text "VDD" at 66.25,76 h1.2
  text "GND" at 70,76 h1.2
  text "D1" at 73.75,76 h1.2
  text "PDAC" at 4.25,64.75 h1.2
  text "GND" at 4.25,62.25 h1.2
  text "D3" at 83.25,56 h1.2
  text "C10" at 86.5,56 h1.2
  text "PD2" at 83.25,53.5 h1.2
  text "-" at 87.5,53.5 h1.2
  text "C11" at 83.25,51 h1.2
  text "C12" at 87.5,51 h1.2
  text "GND" at 83.5,48.5 h1.2
  text "GND" at 87.5,48.5 h1.2
  text "VDD" at 83.5,46 h1.2
  text "GND" at 87.5,46 h1.2
  text "VDD" at 83.75,43.25 h1.2
  text "VDD" at 87.5,43.25 h1.2
  text "-" at 83.75,40.75 h1.2
  text "-" at 87.5,40.75 h1.2
  text "PD12" at 85.75,38.5 h1.2
  text "PD13" at 82.5,35.75 h1.2
  text "PC6" at 87.5,35.75 h1.2
  text "GND" at 5.25,34.25 h1.2
  text "VD" at 18,34.25 h1.2
  text "PC7" at 83,33.25 h1.2
  text "PC8" at 87.5,33.25 h1.2
  text "E10" at 82.75,30.75 h1.2
  text "A10" at 87.5,30.75 h1.2
  text "E8" at 83,28.5 h1.2
  text "E9" at 87.5,28.5 h1.2
  text "PE14" at 62,28.25 h1.2 r90
  text "D1" at 82.75,26 h1.2
  text "E7" at 87.5,26 h1.2
  text "D0" at 83,23.5 h1.2
  text "D15" at 87.5,23.5 h1.2
  text "A15" at 83,20.75 h1.2
  text "D14" at 87.5,20.75 h1.2
  text "8720" at 7.5,20.25 h1.2
  text "D5" at 82.75,18.25 h1.2
  text "D4" at 87.25,18.25 h1.2
  text "VDD" at 7.25,17.75 h1.2
  text "D7" at 80.25,15.25 h1.2
  text "D11" at 86,15.25 h1.2
  text "GND" at 7.25,15 h1.2
  text "A2" at 7.5,12.25 h1.2
  text "C1" at 11.52,12.25 h1.2
  text "A1" at 7.5,10 h1.2
  text "A7" at 11.52,10 h1.2
  text "GND" at 34.5,9.75 h1.2
  text "PA4" at 23,9.5 h1.2
  text "PA5" at 26.75,9.5 h1.2
  text "PA6" at 30.5,9.5 h1.2
  text "B10" at 81,8.75 h1.2
  text "D9" at 85.5,8.75 h1.2
  text "C4" at 7.25,7.5 h1.2
  text "C5" at 11.25,7.5 h1.2
  text "GND" at 14.75,6.5 h1.2
  text "GND" at 19,6.5 h1.2
  text "ETx" at 69.75,5.75 h1.52
  text "ERx" at 74.5,5.5 h1.52
  text "U3Tx" at 79.25,5.5 h1.52
  text "U3Rx" at 85.5,5.5 h1.52
  text "B11" at 7.25,5 h1.2
  text "B12" at 11.25,5 h1.2
  text "PB0" at 32.5,4 h1.2
  text "PB2" at 39.5,4 h1.2
  text "B13" at 7.25,2.5 h1.2
  text "-" at 11.25,2.5 h1.2
  text "PB1" at 36.25,2.5 h1.2
Border:
  the board outline again, w0.2
Drill Drawing:
  lines w0.254: 0,0 100,0 100,96.5 0,96.5 0,0 ; 0,0.25 0,96.25 100,96.25 100,0.25 0,0.25

## Dimensions
0,96.5 to 100,96.5 on Size
0,0 to 0,96.5 on Size